# Altium PCB blackfin_pcb.PcbDoc (part 1 of 4)
Units mil, origin at the board's own origin, x right, y up, seen from the top; angles counter-clockwise.
Board outline 4330.71 x 5905.51 mil, 4 copper layers (Top Layer, GROUND, POWER, Bottom Layer), stack 59.76 mil thick; 381 components, 314 nets, 1218 pads, 647 vias.
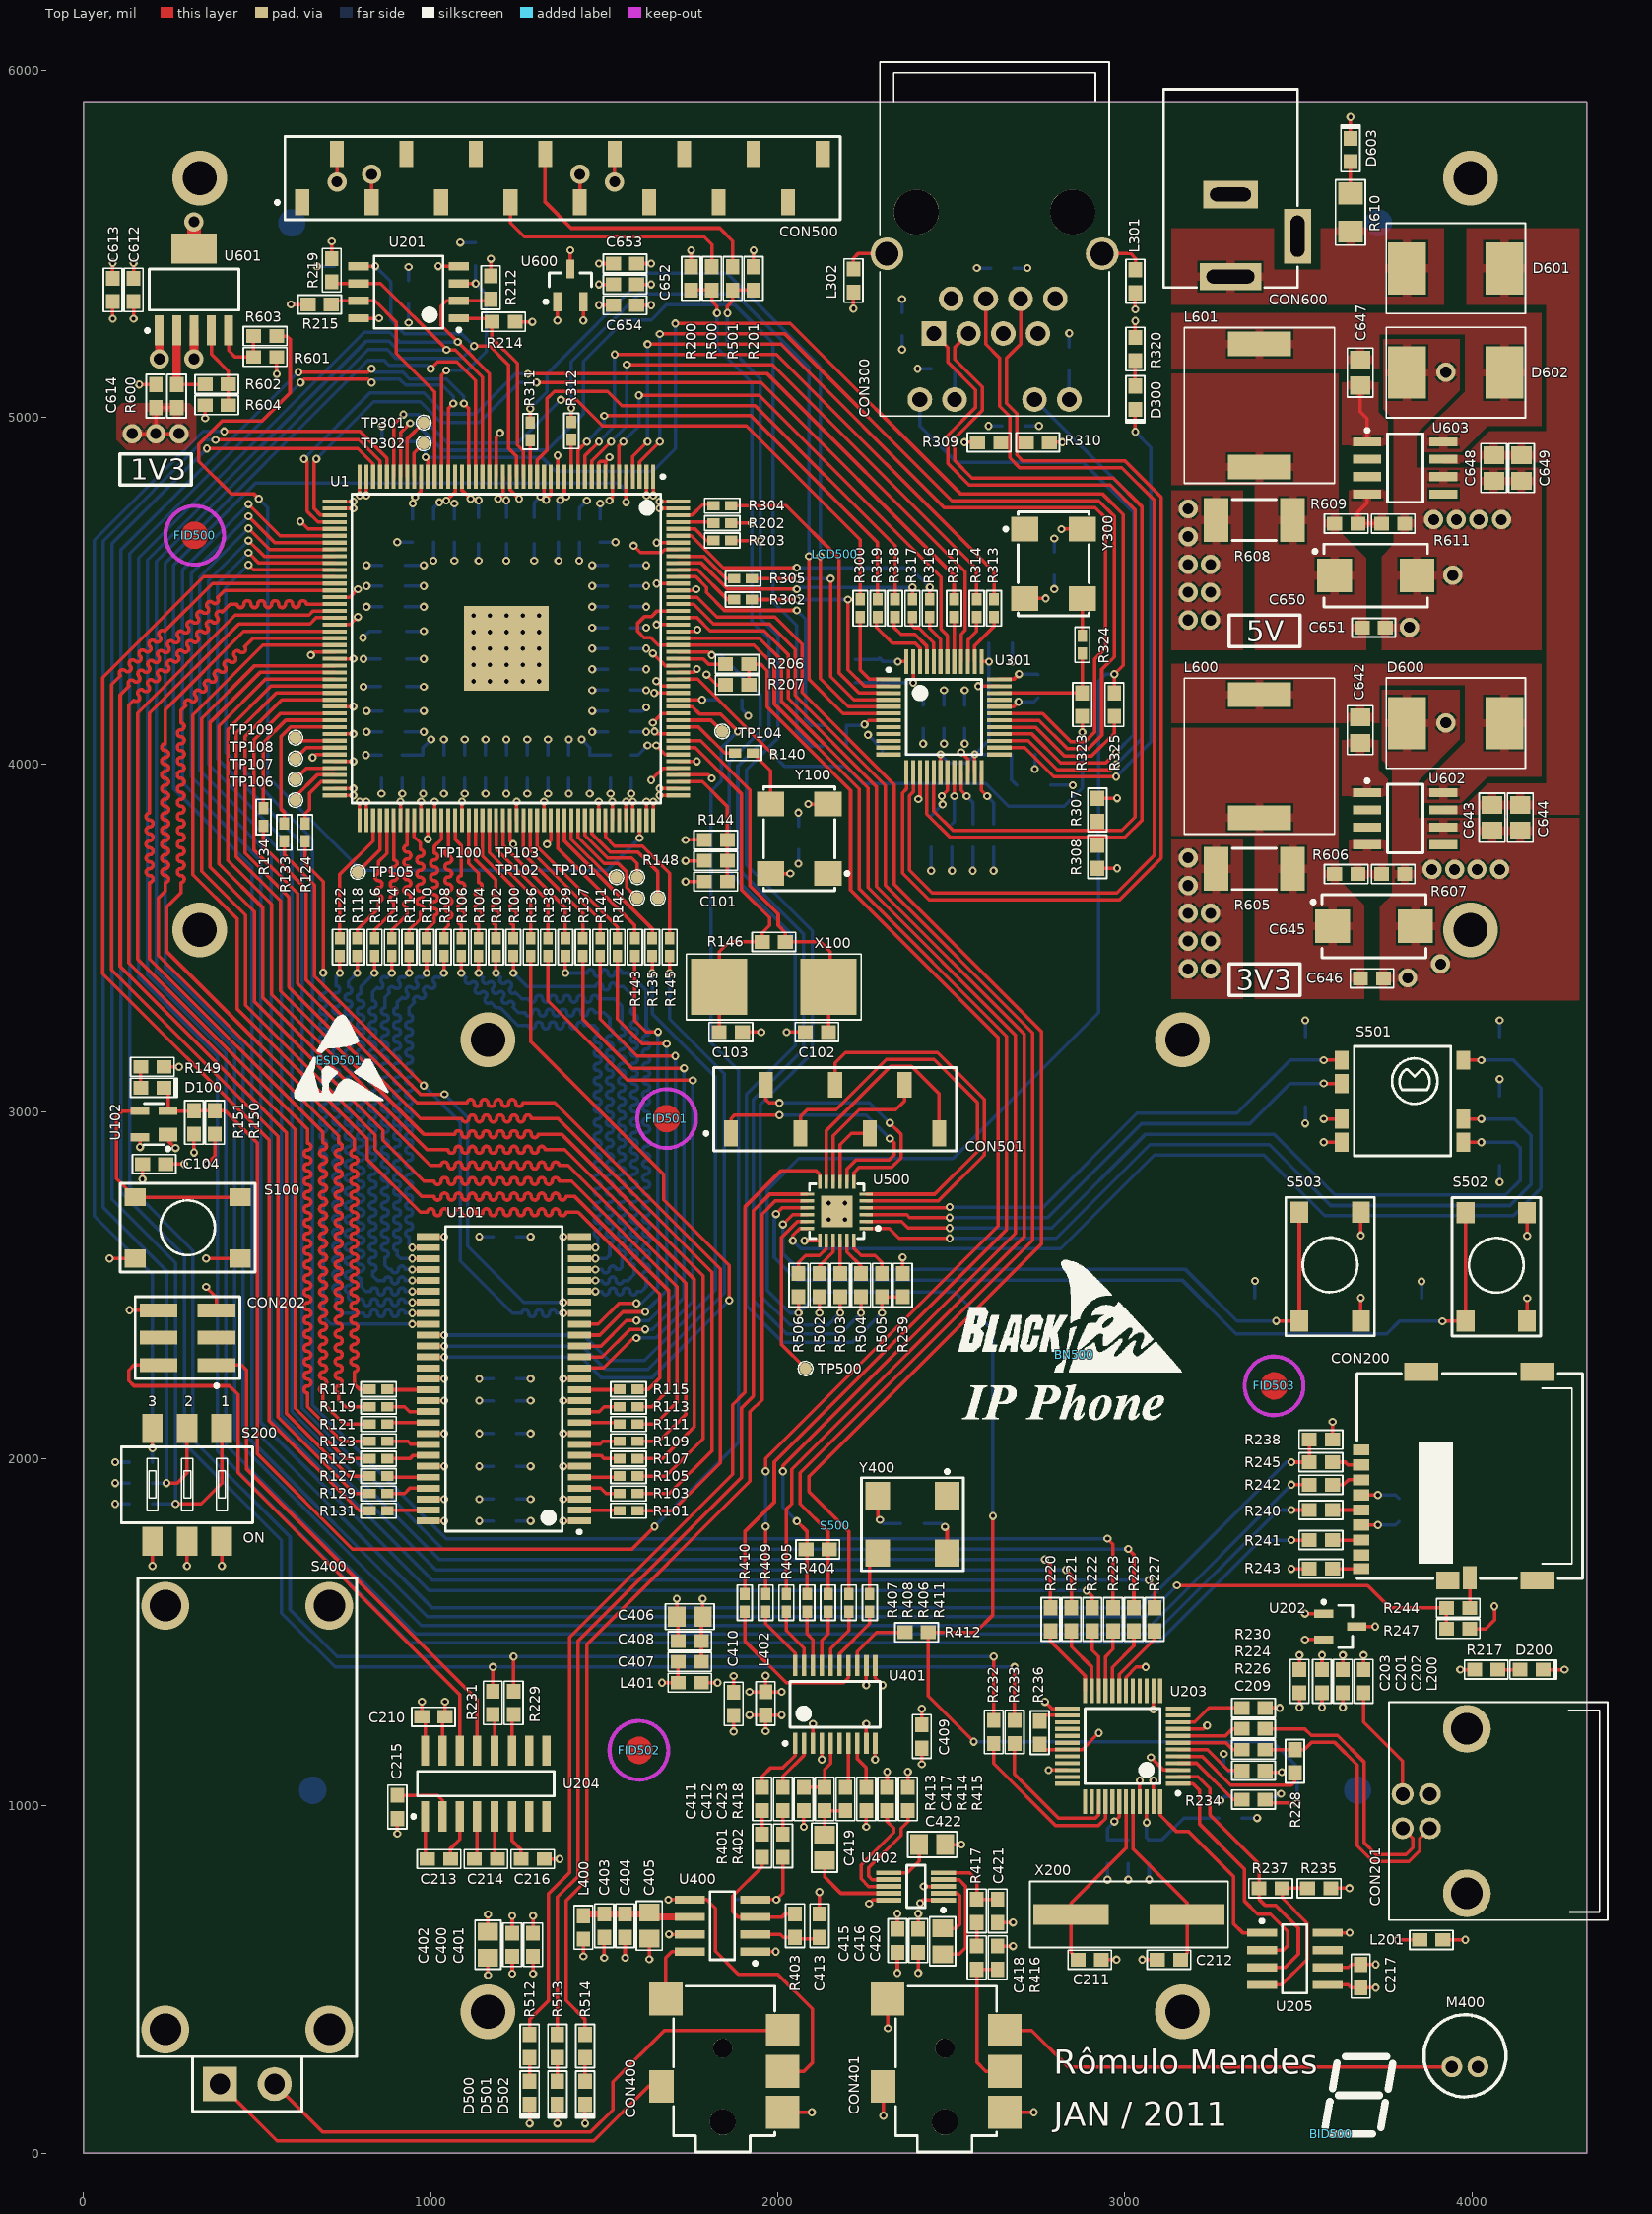
[diagram p0: Top Layer view]
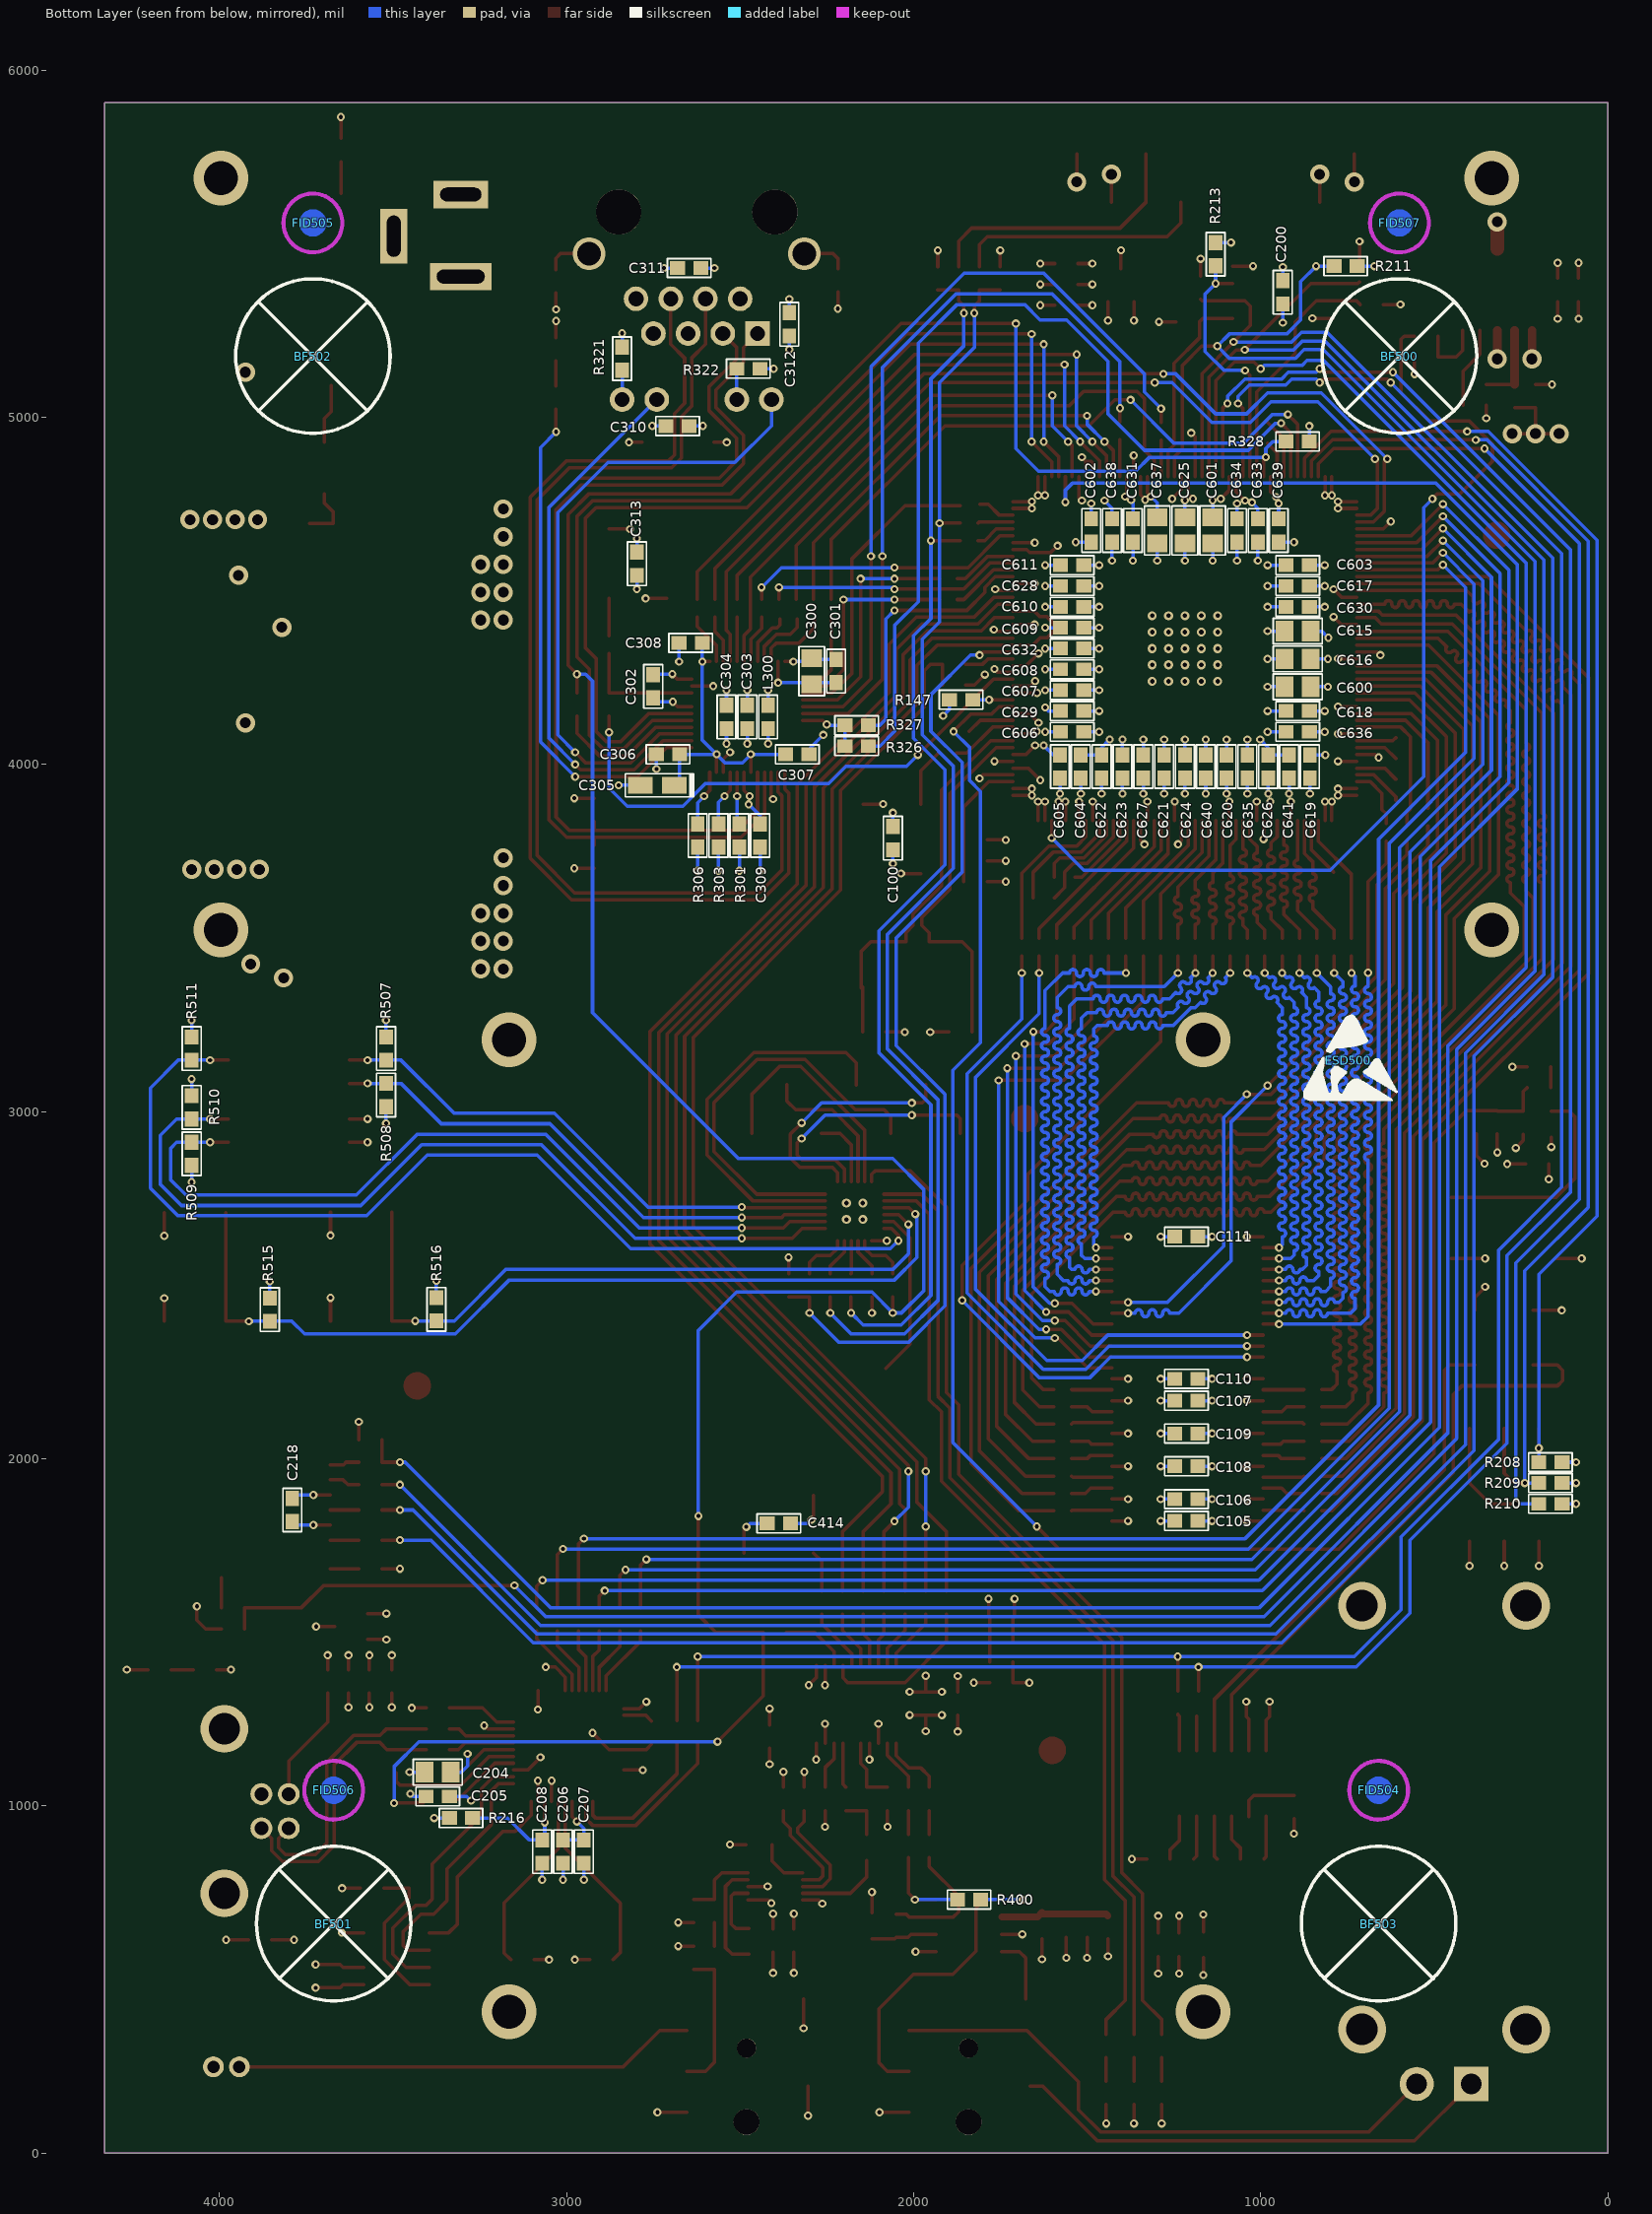
[diagram p1: Bottom Layer view, seen from below]
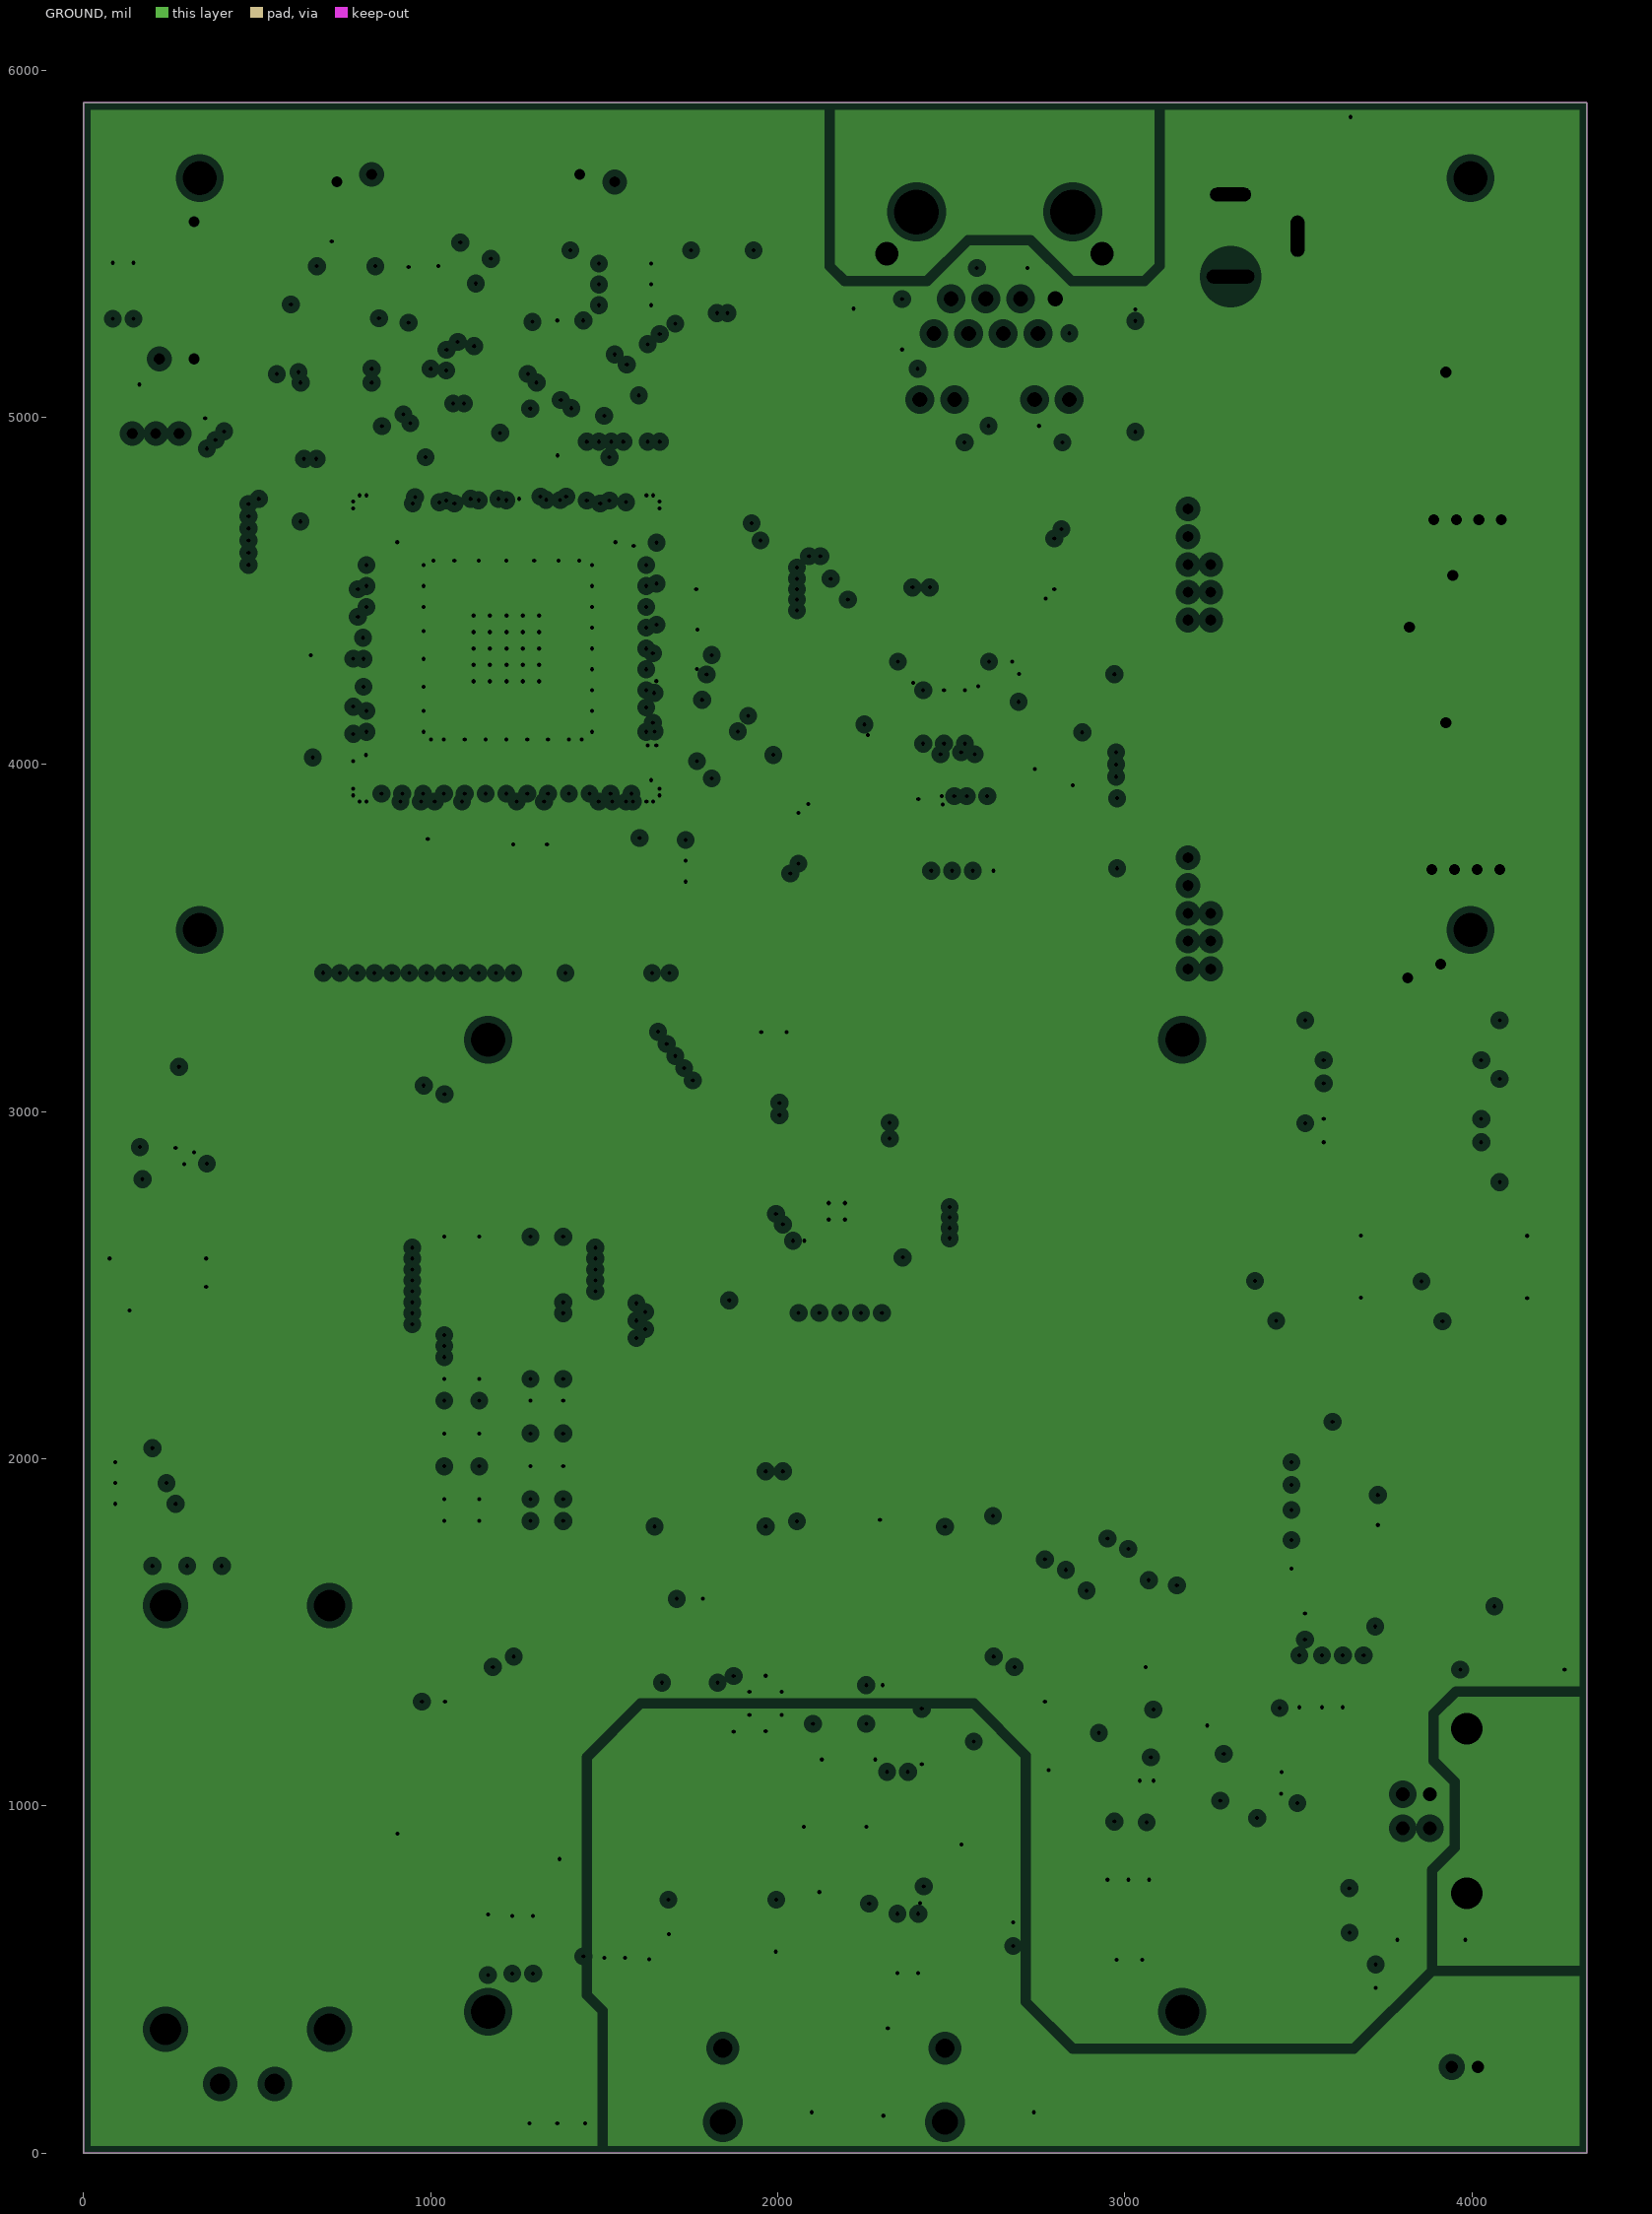
[diagram p2: GROUND, clearances drawn from the general rule]
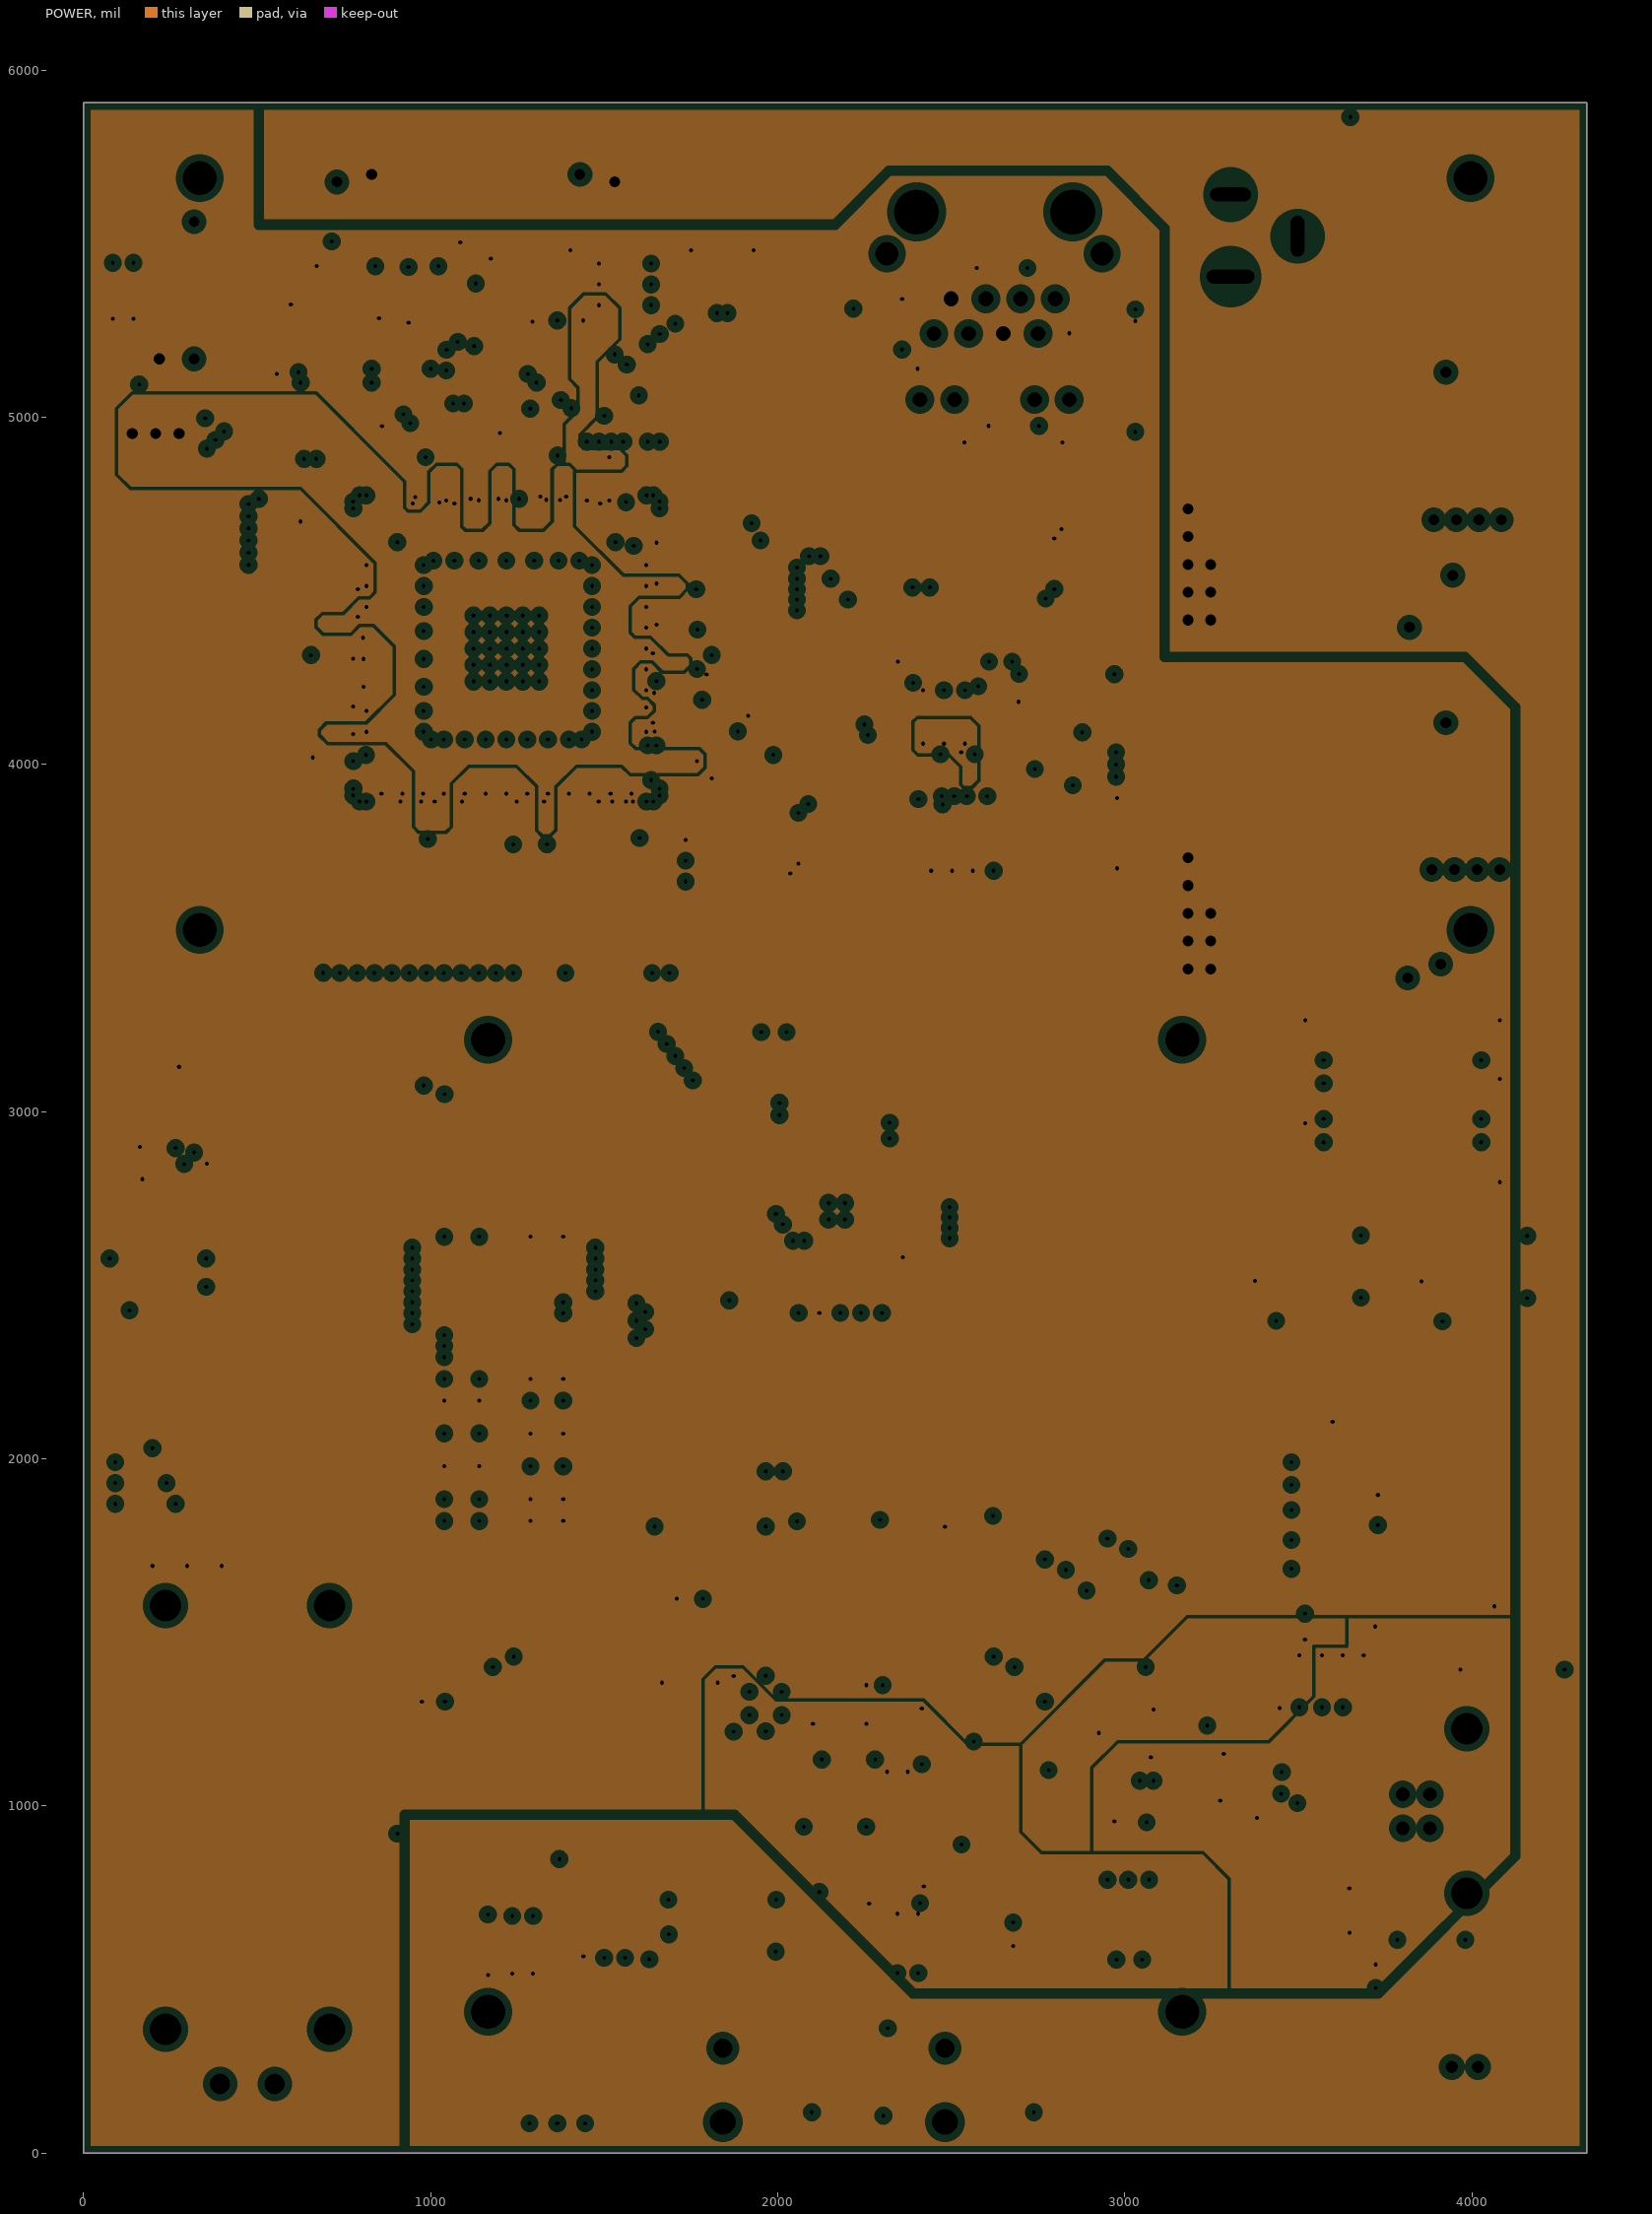
[diagram p3: POWER, clearances drawn from the general rule]

## Layer stack, top to bottom
Top Layer: signal copper 1.58
Dielectric: prepreg 8.5, FR-4, Dk 4.8
GROUND: plane copper 1.3, net (Multiple Nets)
Dielectric: core 37, FR-4, Dk 4.8
POWER: plane copper 1.3, net (Multiple Nets)
Dielectric: prepreg 8.5, FR-4, Dk 4.8
Bottom Layer: signal copper 1.58

## Board outline
0,0 4330.71,0 4330.71,5905.51 0,5905.51

## Design rules (kind name [scope] priority, off if disabled: settings)
Clearance Clearance_5mils [(InComponent('U402'))] p1: gap=5
Clearance Clearance_6mils [All] p2: gap=6
ComponentClearance ComponentClearance_Silks [(HasFootprint('C_0402') OR HasFootprint('C_0603')OR HasFootprint('C_0805') OR HasFootprint('R_0402') OR HasFootprint('R_0603') OR HasFootprint('R_0805') OR HasFootprint('R_1206') OR HasFootprint('R_2512') OR  HasFootprint('L_0402') OR HasFootprint('L_0603')OR HasFootprint('L_0805')OR HasFootprint('LED_0603'))] p1: gap=0 collisioncheckmode=3 verticalgap=10 showdistances=FALSE
ComponentClearance [All] p2: gap=10 collisioncheckmode=3 verticalgap=10 showdistances=FALSE
DiffPairsRouting [All] p1: maxlimit=10 minlimit=10 mostfreqgap=10 maxuncoupledlength=500
FabricationTestPointUsage TestPointUsage [All] p1: valid=0 allowmultiple=FALSE
FabricationTestpoint Testpoint [All] p1: side=3 testpointundercomponent=TRUE minsize=7.87 maxsize=393.7 preferedsize=60 minholesize=0 maxholesize=40 preferedholesize=32 testpointgrid=0 allowsidetop=TRUE allowsidebottom=TRUE usegrid=FALSE gridtolerance=0.01
Height [All] p1: minheight=0 maxheight=2000 prefheight=500
HoleSize [All] p1: absolutevalues=TRUE maxlimit=137.8 minlimit=1 maxpercent=80.000 minpercent=20.000
MatchedLengths MatchedLengths_SDRAM_address [InNetClass('A[1..19]') or InNet('SA10')] p1 off: tolerance=20 checknetsindiffpair=TRUE checkdiffpairvsdiffpair=TRUE checkothers=TRUE
MatchedLengths MatchedLengths_SDRAM_data [InNet('NetR117_1') or InNet('NetR119_1') or InNet('NetR121_1') or InNet('NetR123_1') or InNet('NetR125_1') or InNet('NetR127_1') or InNet('NetR129_1') or InNet('NetR131_1') or InNet('NetR101_1') or InNet('NetR103_1') or InNet('NetR105_1') or InNet('NetR107_1') or InNet('NetR109_1') or InNet('NetR111_1') or InNet('NetR113_1') or InNet('NetR115_1')] p2 off: tolerance=20 checknetsindiffpair=TRUE checkdiffpairvsdiffpair=TRUE checkothers=TRUE
PlaneClearance [All] p1: clearance=20
PlaneConnect [All] p1: planeconnectstyle=Direct reliefexpansion=20 reliefentries=4 reliefconductorwidth=20 reliefairgap=10
PolygonConnect [All] p1: connectstyle=Relief reliefconductorwidth=25 reliefentries=4 polygonreliefangle="90 Angle"
RoutingVias [All] p1: holewidth=28 width=50 viastyle="Through Hole" minholewidth=10 minwidth=20 maxholewidth=100 maxwidth=160
SilkscreenOverComponentPads [All] p1: minsilkscreentomaskgap=10
SolderMaskExpansion [All] p1: expansion=4
Width [InNet('VCC3V3') OR InNet('AVCC5V') OR InNet('GND') OR InNet('NetR600_1') OR IsArc OR InNet('TD_N') OR InNet('TD_P')] p1: maxlimit=100 minlimit=10 preferedwidth=10
Width Width_Impedance_Control [All] p2: maxlimit=11.55 minlimit=7.62 preferedwidth=9.42 impedancedriven=TRUE minimp=54.000000 maximp=66.000000 favimp=60.000000
19 further rules are at their usual default settings.

## Classes and differential pairs
component class blackfin_d_codec: C400 C401 C402 C403 C404 C405 C406 C407 C408 C409 C410 C411 C412 C413 C414 C415 C416 C417 C418 C419 C420 C421 C422 C423 CON400 CON401 L400 L401 L402 L403 L404 L405 M400 R400 R401 R402 R403 R404 R405 R406 R407 R408 R409 R410 R411 R412 R413 R414 R415 R416 R417 R418 S400 U400 U401 U402 Y400
component class blackfin_e_lcd_keypad: B500 BF500 BF501 BF502 BF503 BID500 BN500 CON500 CON501 D500 D501 D502 ESD500 ESD501 FID500 FID501 FID502 FID503 FID504 FID505 FID506 FID507 KEYPAD_HEADER500 LCD500 LCD_HEADER500 LCD_HEADER501 LCD_HEADER502 LCD_RES500 LCD_RES501 R500 R501 R502 R503 R504 R505 R506 R507 R508 R509 R510 R511 R512 R513 R514 R515 R516 S500 S501 S502 S503 S504 S505 SCREW500 SCREW501 SCREW502 SCREW503 SCREW504 SCREW505 SCREW506 SCREW507 SCREW508 SCREW509 SCREW510 SCREW511 SCREW512 SCREW513 SCREW514 SCREW515 SPACER500 SPACER501 SPACER502 SPACER503 SPACER504 SPACER505 SPACER506 SPACER507 TP500 U500
component class blackfin_c_ethernet: C300 C301 C302 C303 C304 C305 C306 C307 C308 C309 C310 C311 C312 C313 CON300 D300 L300 L301 L302 R300 R301 R302 R303 R304 R305 R306 R307 R308 R309 R310 R311 R312 R313 R314 R315 R316 R317 R318 R319 R320 R321 R322 R323 R324 R325 R326 R327 R328 TP300 TP301 TP302 U301 Y300
component class blackfin_b_flash_jtag_serial: C200 C201 C202 C203 C204 C205 C206 C207 C208 C209 C210 C211 C212 C213 C214 C215 C216 C217 C218 CON200 CON201 CON202 D200 D201 L200 L201 R200 R201 R202 R203 R206 R207 R208 R209 R210 R211 R212 R213 R214 R215 R216 R217 R218 R219 R220 R221 R222 R223 R224 R225 R226 R227 R228 R229 R230 R231 R232 R233 R234 R235 R236 R237 R238 R239 R240 R241 R242 R243 R244 R245 R247 S200 U201 U202 U203 U204 U205 U206 X200
component class blackfin_a_sdram: C100 C101 C102 C103 C104 C105 C106 C107 C108 C109 C110 C111 D100 R100 R101 R102 R103 R104 R105 R106 R107 R108 R109 R110 R111 R112 R113 R114 R115 R116 R117 R118 R119 R121 R122 R123 R124 R125 R127 R129 R131 R133 R134 R135 R136 R137 R138 R139 R140 R141 R142 R143 R144 R145 R146 R147 R148 R149 R150 R151 S100 TP100 TP101 TP102 TP103 TP104 TP105 TP106 TP107 TP108 TP109 U1 U101 U102 X100 Y100
component class blackfin_f_power: AC600 AC601 C600 C601 C602 C603 C604 C605 C606 C607 C608 C609 C610 C611 C612 C613 C614 C615 C616 C617 C618 C619 C620 C621 C622 C623 C624 C625 C626 C627 C628 C629 C630 C631 C632 C633 C634 C635 C636 C637 C638 C639 C640 C641 C642 C643 C644 C645 C646 C647 C648 C649 C650 C651 C652 C653 C654 CON600 D600 D601 D602 D603 L600 L601 R600 R601 R602 R603 R604 R605 R606 R607 R608 R609 R610 R611 U600 U601 U602 U603
net class A[1..19]: A1 A2 A3 A4 A5 A6 A7 A8 A9 A10 A12 A13 A18 A19
net class D[0..15]: D0 D1 D2 D3 D4 D5 D6 D7 D8 D9 D10 D11 D12 D13 D14 D15
differential pair RD: +RD_P -RD_N
differential pair TD: +TD_P -TD_N
differential pair USB_CONN: +USB_CONN_P -USB_CONN_N
differential pair USB: +USB_P -USB_N

## Components (designator, comment, footprint, x,y, rotation, side; value= is the part's Value field where it differs from the comment)
BF500 "Board Foot" "Board Foot (Hemisphere)" 600,5175.51 r180 bottom locked
BF501 "Board Foot" "Board Foot (Hemisphere)" 3670.71,660 r180 bottom locked
BF502 "Board Foot" "Board Foot (Hemisphere)" 3730.71,5175.51 r180 bottom locked
BF503 "Board Foot" "Board Foot (Hemisphere)" 660,660 r180 bottom locked
BID500 "Board_ID" BOARD_ID 3595,55 r0 top
BN500 "Board_Name" LOGO 2855,2300 r0 top
C100 "10nF" C_0603 2059.65,3787.62 r270 bottom
C101 "220pF" C_0603 1821.65,3662.54 r0 top
C102 "22pF" C_0603 2112.86,3229.13 r0 top
C103 "22pF" C_0603 1864.83,3229.13 r180 top
C104 "10nF" C_0603 203.11,2848.98 r180 top locked
C105 "10nF" C_0603 1213.98,1820.71 r0 bottom
C106 "10nF" C_0603 1213.98,1883.7 r0 bottom
C107 "10nF" C_0603 1213.98,2167.17 r180 bottom
C108 "10nF" C_0603 1213.98,1978.19 r180 bottom
C109 "10nF" C_0603 1213.98,2072.68 r0 bottom
C110 "10nF" C_0603 1213.98,2230.16 r0 bottom
C111 "10nF" C_0603 1213.98,2639.61 r0 bottom
C200 "10nF" C_0603 936.18,5360.27 r270 bottom
C201 "1uF" C_0603 3568.11,1358.98 r90 top
C202 "100nF" C_0603 3628.11,1358.98 r90 top
C203 "2,2uF" C_0603 3503.11,1358.98 r90 top
C204 "10uF" C_0805 3371.02,1097.11 r180 bottom
C205 "10nF" C_0603 3371.02,1027.11 r180 bottom
C206 "100nF" C_0603 3010.02,868.11 r90 bottom
C207 "100nF" C_0603 2950.02,868.11 r90 bottom
C208 "100nF" C_0603 3070.02,868.11 r90 bottom
C209 "33nF" C_0603 3371.02,1102.11 r0 top
C210 "100nF" C_0603 1007.98,1256.89 r180 top
C211 "22pF" C_0603 2899.02,557.11 r0 top
C212 "22pF" C_0603 3127.02,557.11 r180 top
C213 "100nF" C_0603 1023.98,846.89 r180 top
C214 "100nF" C_0603 1158.98,846.89 r180 top
C215 "100nF" C_0603 903.98,996.89 r90 top
C216 "100nF" C_0603 1293.98,846.89 r180 top
C217 "100nF" C_0603 3679.57,509.51 r90 top
C218 "100nF" C_0603 3790,1852.36 r90 bottom
C300 "10uF" C_0805 2293.66,4268.82 r90 bottom
C301 "100nF" C_0603 2223.11,4268.98 r90 bottom
C302 "100nF" C_0603 2750,4225 r270 bottom
C303 "1uF" C_0603 2478.98,4136.89 r270 bottom
C304 "100nF" C_0603 2538.98,4136.89 r270 bottom
C305 "10uF" C_Case_A 2738.2,3940 r0 bottom
C306 "100nF" C_0603 2707.46,4029.13 r180 bottom
C307 "100nF" C_0603 2335,4029.13 r0 bottom
C308 "100nF" C_0603 2642.13,4350 r180 bottom
C309 "100nF" C_0603 2442,3795 r270 bottom
C310 "100nF" C_0603 2680,4975 r180 bottom
C311 "100nF" C_0603 2646.54,5430 r0 bottom
C312 "100nF" C_0603 2358.11,5267.98 r270 bottom
C313 "10nF" C_0603 2797.02,4578.11 r90 bottom
C400 "100nF" C_0603 1235,600 r270 top
C401 "1uF" C_0603 1295,600 r270 top
C402 "10uF" C_0805 1165,600 r270 top
C403 "100nF" C_0603 1500,655 r90 top
C404 "1uF" C_0603 1560,655 r90 top
C405 "10uF" C_0805 1630,655 r90 top
C406 "10uF" C_0805 1746.54,1545 r180 top
C407 "100nF" C_0603 1746.54,1415 r180 top
C408 "100nF" C_0603 1746.54,1475 r180 top
C409 "1uF" C_0603 2415,1200 r90 top
C410 "100nF" C_0603 1872.81,1294 r90 top
C411 "1uF" C_0603 1955,1020 r90 top
C412 "1uF" C_0603 2015,1020 r90 top
C413 "100nF" C_0603 2120,655 r270 top
C414 "10nF" C_0603 2388.11,1813.84 r0 bottom
C415 "100nF" C_0603 2344.81,611.54 r90 top
C416 "1uF" C_0603 2404.81,611.54 r90 top
C417 "100nF" C_0603 2255,1020 r90 top
C418 "100nF" C_0603 2573.52,562.62 r90 top
C419 "10uF" C_0805 2135,880 r90 top
C420 "10uF" C_0805 2475,610 r90 top
C421 "1nF" C_0603 2633.52,697.62 r90 top
C422 "10uF" C_0805 2445.17,888.52 r0 top
C423 "47nF" C_0603 2075,1020 r90 top
C600 "10uF" C_0805 893.11,4223.98 r180 bottom locked
C601 "10uF" C_0805 1138.11,4673.98 r90 bottom locked
C602 "100nF" C_0603 1488.11,4673.98 r90 bottom locked
C603 "100nF" C_0603 893.11,4573.98 r180 bottom locked
C604 "100nF" C_0603 1518.11,3993.98 r270 bottom locked
C605 "100nF" C_0603 1578.11,3993.98 r270 bottom locked
C606 "10nF" C_0603 1543.11,4093.98 r0 bottom locked
C607 "10nF" C_0603 1543.11,4213.98 r0 bottom locked
C608 "10nF" C_0603 1543.11,4273.98 r0 bottom locked
C609 "10nF" C_0603 1543.11,4393.98 r0 bottom locked
C610 "10nF" C_0603 1543.11,4453.98 r0 bottom locked
C611 "10nF" C_0603 1543.11,4573.98 r0 bottom locked
C612 "1uF" C_0603 143.98,5366.89 r270 top
C613 "100nF" C_0603 83.98,5366.89 r270 top
C614 "1uF" C_0603 208.11,5061.18 r270 top
C615 "10uF" C_0805 893.11,4383.98 r180 bottom locked
C616 "10uF" C_0805 893.11,4303.98 r180 bottom locked
C617 "100nF" C_0603 893.11,4513.98 r180 bottom locked
C618 "100nF" C_0603 893.11,4153.98 r180 bottom locked
C619 "10nF" C_0603 858.11,3993.98 r270 bottom locked
C620 "10nF" C_0603 1098.11,3993.98 r270 bottom locked
C621 "10nF" C_0603 1278.11,3993.98 r270 bottom locked
C622 "10nF" C_0603 1458.11,3993.98 r270 bottom locked
C623 "10nF" C_0603 1398.11,3993.98 r270 bottom locked
C624 "10nF" C_0603 1218.11,3993.98 r270 bottom locked
C625 "10uF" C_0805 1218.11,4673.98 r90 bottom locked
C626 "100nF" C_0603 978.11,3993.98 r270 bottom locked
C627 "100nF" C_0603 1338.11,3993.98 r270 bottom locked
C628 "100nF" C_0603 1543.11,4513.98 r0 bottom locked
C629 "100nF" C_0603 1543.11,4153.98 r0 bottom locked
C630 "10nF" C_0603 893.11,4453.98 r180 bottom locked
C631 "10nF" C_0603 1368.11,4673.98 r90 bottom locked
C632 "10nF" C_0603 1543.11,4333.98 r0 bottom locked
C633 "10nF" C_0603 1008.11,4673.98 r90 bottom locked
C634 "10nF" C_0603 1068.11,4673.98 r90 bottom locked
C635 "10nF" C_0603 1038.11,3993.98 r270 bottom locked
C636 "10nF" C_0603 893.11,4093.98 r180 bottom locked
C637 "10uF" C_0805 1298.11,4673.98 r90 bottom locked
C638 "100nF" C_0603 1428.11,4673.98 r90 bottom locked
C639 "100nF" C_0603 948.11,4673.98 r90 bottom locked
C640 "100nF" C_0603 1158.11,3993.98 r270 bottom locked
C641 "100nF" C_0603 918.11,3993.98 r270 bottom locked
C642 "10nF" C_0805 3678.11,4098.98 r90 top
C643 "10uF" C_0805 4058.11,3846.38 r90 top
C644 "4,7uF" C_0805 4139.37,3846.38 r90 top
C645 "470uF" C_Case_Y 3718.11,3533.98 r0 top
C646 "100nF" C_0603 3712.24,3383.98 r180 top
C647 "10nF" C_0805 3678.11,5128.98 r90 top
C648 "10uF" C_0805 4063.11,4853.98 r90 top
C649 "4,7uF" C_0805 4143.11,4853.98 r90 top
C650 "470uF" C_Case_Y 3723.11,4543.98 r0 top
C651 "100nF" C_0603 3717.24,4393.98 r180 top
C652 "1uF" C_0603 1560,5382.81 r180 top
C653 "100nF" C_0603 1560,5442.81 r180 top
C654 "2,2uF" C_0603 1560,5322.81 r180 top
CON200 "MicroSD" MICRO_SD 3935,1950 r270 top locked
CON201 "USB Connector" "USB Connector" 3800.39,1033.98 r90 top locked
CON202 "RS-232_CONN" Header_2x3 383,2270 r90 top
CON300 "RJ-45" RJ-45 2449.65,5241.43 r180 top locked
CON400 "Phone_Jack" Phone_Jack 2013.78,117.2 r90 top locked
CON401 "Phone_Jack" Phone_Jack 2653.54,117.2 r90 top locked
CON500 "LCD_Connector" SOCKET_1x16 629.92,5619 r0 top locked
CON501 "Keypad_Connector" SOCKET_1x7 2165.35,3007.09 r0 top locked
CON600 "Power_Jack" Power_Jack 3304.65,5405.51 r270 top
D100 "LED" LED_0603 198.11,3068.98 r0 top locked
D200 "LED" LED_0603 4171.89,1392.44 r0 top
D300 "LED" LED_0603 3030.11,5056.46 r270 top
D500 "LED" LED_0603 1285,173.46 r270 top
D501 "LED" LED_0603 1365,173.46 r270 top
D502 "LED" LED_0603 1445,173.46 r270 top
D600 "MBRS330T3G" Case_430 3813.11,4118.98 r0 top
D601 "MBRS330T3G" Case_430 3813.11,5428.98 r0 top
D602 "MBRS330T3G" Case_430 3813.11,5128.98 r0 top
D603 "LED" LED_0603 3650,5770 r90 top
ESD500 "ESD" ESD 747,3147 r180 bottom
ESD501 "ESD" ESD 737,3148 r0 top
FID500 "Fiducial" Fiducial 320,4660 r90 top
FID501 "Fiducial" Fiducial 1680,2980 r90 top
FID502 "Fiducial" Fiducial 1600,1160 r90 top
FID503 "Fiducial" Fiducial 3430,2210 r90 top
FID504 "Fiducial" Fiducial 660,1045 r270 bottom
FID505 "Fiducial" Fiducial 3730.71,5560 r270 bottom
FID506 "Fiducial" Fiducial 3670.71,1045 r270 bottom
FID507 "Fiducial" Fiducial 600,5560 r270 bottom
L200 "FBEAD" L_0603 3688.11,1358.98 r90 top
L201 "FBEAD" L_0603 3883.11,613.98 r180 top
L300 "FBEAD" L_0603 2418.98,4136.89 r270 bottom
L301 "FBEAD" L_0603 3030.11,5391.98 r90 top
L302 "FBEAD" L_0603 2218.11,5393.98 r90 top
L400 "FBEAD" L_0603 1440,650 r90 top
L401 "FBEAD" L_0603 1746.54,1355 r0 top
L402 "FBEAD" L_0603 1965,1295 r270 top
L600 "22uH" Inductor_22uH 3388.11,4023.98 r0 top
L601 "22uH" Inductor_22uH 3388.11,5033.98 r0 top
LCD500 "LCD" LCD 2165.35,4606.3 r180 top locked
M400 "POM-2738P-C33-R" Microphone 3980,280 r180 top
R100 "22R" R_0402 1238.11,3473.98 r90 top
R101 "22R" R_0402 1570,1850 r180 top
R102 "22R" R_0402 1188.11,3473.98 r90 top
R103 "22R" R_0402 1570,1900 r180 top
R104 "22R" R_0402 1138.11,3473.98 r90 top
R105 "22R" R_0402 1570,1950 r180 top
R106 "22R" R_0402 1088.11,3473.98 r90 top
R107 "22R" R_0402 1570,2000 r180 top
R108 "22R" R_0402 1038.11,3473.98 r90 top
R109 "22R" R_0402 1570,2050 r180 top
R110 "22R" R_0402 988.11,3473.98 r90 top
R111 "22R" R_0402 1570,2100 r180 top
R112 "22R" R_0402 938.11,3473.98 r90 top
R113 "22R" R_0402 1570,2150 r180 top
R114 "22R" R_0402 888.11,3473.98 r90 top
R115 "22R" R_0402 1570,2200 r180 top
R116 "22R" R_0402 838.11,3473.98 r90 top
R117 "22R" R_0402 850,2200 r0 top
R118 "22R" R_0402 788.11,3473.98 r90 top
R119 "22R" R_0402 850,2150 r0 top
R121 "22R" R_0402 850,2100 r0 top
R122 "22R" R_0402 738.11,3473.98 r90 top
R123 "22R" R_0402 850,2050 r0 top
R124 "22R" R_0402 638.11,3803.98 r90 top
R125 "22R" R_0402 850,2000 r0 top
R127 "22R" R_0402 850,1950 r0 top
R129 "22R" R_0402 850,1900 r0 top
R131 "22R" R_0402 850,1850 r0 top
R133 "22R" R_0402 578.11,3803.98 r90 top
R134 "22R" R_0402 518.11,3848.98 r90 top
R135 "22R" R_0402 1638.11,3473.98 r90 top
R136 "22R" R_0402 1288.11,3473.98 r270 top
R137 "22R" R_0402 1438.11,3473.98 r90 top
R138 "22R" R_0402 1338.11,3473.98 r270 top
R139 "22R" R_0402 1388.11,3473.98 r90 top
R140 "33R" R_0402 1902.52,4032.88 r180 top
R141 "22R" R_0402 1488.11,3473.98 r90 top
R142 "22R" R_0402 1538.11,3473.98 r90 top
R143 "22R" R_0402 1588.11,3473.98 r90 top
R144 "100K" R_0603 1821.65,3782.54 r180 top
R145 "22R" R_0402 1688.11,3473.98 r270 top
R146 "10M" R_0603 1988.84,3489.13 r180 top
R147 "10K" R_0603 1863.11,4186.34 r0 bottom
R148 "33K" R_0603 1821.65,3722.54 r0 top
R149 "100R" R_0603 198.11,3128.98 r0 top locked
R150 "10K" R_0603 378.11,2968.98 r90 top locked
R151 "100K" R_0603 318.11,2968.98 r90 top locked
R200 "1K2" R_0603 1750.18,5400 r90 top
R201 "1K2" R_0603 1930.18,5400 r90 top
R202 "33R" R_0402 1840,4695 r180 top
R203 "33R" R_0402 1840,4645 r180 top
R206 "0R" R_0603 1883.11,4288.98 r180 top
R207 "4K7" R_0603 1883.11,4228.98 r0 top
R208 "4K7" R_0603 165,1990 r0 bottom
R209 "4K7" R_0603 165,1930 r0 bottom
R210 "4K7" R_0603 165,1870 r0 bottom
R211 "10K" R_0603 755,5435.27 r180 bottom
R212 "10K" R_0603 1173.11,5373.73 r90 top
R213 "10K" R_0603 1129.73,5470 r90 bottom
R214 "10K" R_0603 1210,5275 r0 top
R215 "10K" R_0603 680,5325 r180 top
R216 "470R" R_0603 3304.09,965 r180 bottom
R217 "150R" R_0603 4041.54,1392.44 r180 top
R219 "10K" R_0603 715,5423.73 r270 top
R220 "0R" R_0603 2786.02,1537.11 r90 top
R221 "0R" R_0603 2846.02,1537.11 r90 top
R222 "0R" R_0603 2906.02,1537.11 r90 top
R223 "0R" R_0603 2966.02,1537.11 r90 top
R224 "27R" R_0603 3371.02,1222.11 r180 top
R225 "0R" R_0603 3026.02,1537.11 r90 top
R226 "27R" R_0603 3371.02,1162.11 r180 top
R227 "0R" R_0603 3086.02,1537.11 r90 top
R228 "1K5" R_0603 3490,1128.65 r270 top
R229 "0R" R_0603 1238.98,1296.89 r270 top
R230 "10K" R_0603 3371.02,1282.11 r180 top
R231 "0R" R_0603 1178.98,1296.89 r270 top
R232 "0R" R_0603 2622.18,1212.89 r90 top
R233 "0R" R_0603 2682.18,1212.89 r90 top
R234 "0R" R_0603 3371.02,1018.11 r180 top
R235 "10K" R_0603 3560,762.82 r0 top
R236 "10K" R_0603 2755,1211 r90 top
R237 "2K2" R_0603 3420,762.82 r0 top
R238 "10K" R_0603 3565,2055 r0 top
R239 "4K7" R_0603 2360,2500 r270 top
R240 "0R" R_0603 3565,1852.36 r0 top
R241 "0R" R_0603 3565,1765.75 r0 top
R242 "0R" R_0603 3565,1925 r0 top
R243 "0R" R_0603 3565,1683.07 r0 top
R244 "0R" R_0603 3960.59,1570 r180 top
R245 "0R" R_0603 3565,1990 r180 top
R247 "10K" R_0603 3960.59,1510 r0 top
R300 "50R" R_0402 2238,4450 r270 top
R301 "2K2" R_0603 2502,3795 r90 bottom
R302 "50R" R_0402 1900,4475 r0 top
R303 "2K2" R_0603 2562,3795 r90 bottom
R304 "50R" R_0402 1840,4745 r0 top
R305 "50R" R_0402 1900,4535 r0 top
R306 "4K87" R_0603 2622,3795 r90 bottom
R307 "49R9" R_0603 2920.73,3869.16 r90 top
R308 "49R9" R_0603 2920.73,3734.16 r270 top
R309 "49R9" R_0603 2609.11,4927.98 r180 top
R310 "49R9" R_0603 2749.11,4927.98 r0 top
R311 "50R" R_0402 1287.01,4958.98 r90 top
R312 "50R" R_0402 1405.12,4960.47 r90 top
R313 "50R" R_0402 2623,4450 r270 top
R314 "50R" R_0402 2573,4450 r270 top
R315 "50R" R_0402 2508,4450 r270 top
R316 "50R" R_0402 2438,4450 r270 top
R317 "50R" R_0402 2388,4450 r270 top
R318 "50R" R_0402 2338,4450 r270 top
R319 "50R" R_0402 2288,4450 r270 top
R320 "130R" R_0603 3030.11,5196.46 r90 top
R321 "270R" R_0603 2839.8,5168.98 r90 bottom
R322 "270R" R_0603 2476.02,5140 r180 bottom
R323 "0R" R_0603 2877.38,4172.32 r90 top
R324 "33R" R_0402 2877.38,4345 r270 top
R325 "0R" R_0603 2970,4172.32 r90 top
R326 "0R" R_0603 2163.98,4052.95 r180 bottom
R327 "0R" R_0603 2163.98,4112.89 r180 bottom
R328 "10K" R_0603 893.31,4930 r0 bottom
R400 "20K" R_0603 1840,730 r180 bottom
R401 "20K" R_0603 1955,885 r90 top
R402 "20K" R_0603 2015,885 r90 top
R403 "20K" R_0603 2050,655 r90 top
R404 "0R" R_0603 2115.11,1738.84 r180 top
R405 "22R" R_0402 2025,1585 r270 top
R406 "22R" R_0402 2205,1585 r270 top
R407 "22R" R_0402 2085,1585 r270 top
R408 "22R" R_0402 2145,1585 r270 top
R409 "22R" R_0402 1965,1585 r270 top
R410 "22R" R_0402 1905,1585 r270 top
R411 "33R" R_0402 2265,1585 r270 top
R412 "0R" R_0603 2400,1500 r180 top
R413 "10K" R_0603 2195,1020 r90 top
R414 "15K" R_0603 2315,1020 r90 top
R415 "1K" R_0603 2375,1020 r90 top
R416 "2K2" R_0603 2633.52,562.62 r270 top
R417 "10K" R_0603 2573.52,697.62 r90 top
R418 "100K" R_0603 2135,1020 r90 top
R500 "0R" R_0603 1810.18,5400 r270 top
R501 "0R" R_0603 1870.18,5400 r270 top
R502 "0R" R_0603 2120,2500 r270 top
R503 "0R" R_0603 2180,2500 r270 top
R504 "0R" R_0603 2240,2500 r270 top
R505 "0R" R_0603 2300,2500 r270 top
R506 "0R" R_0603 2060,2500 r270 top
R507 "10K" R_0603 3520,3181.57 r270 bottom
R508 "10K" R_0603 3520,3047.72 r90 bottom
R509 "10K" R_0603 4080,2878.43 r90 bottom
R510 "10K" R_0603 4080,3012.28 r270 bottom
R511 "10K" R_0603 4080,3181.57 r270 bottom
R512 "100R" R_0603 1285,308.46 r90 top
R513 "100R" R_0603 1365,308.46 r90 top
R514 "100R" R_0603 1445,308.46 r90 top
R515 "10K" R_0603 3855,2429.47 r270 bottom
R516 "10K" R_0603 3375,2430.47 r270 bottom
R600 "0R" R_0603 268.11,5061.18 r270 top
R601 "0R" R_0603 523.11,5173.98 r0 top
R602 "20K" R_0603 383.46,5095 r180 top
R603 "0R" R_0603 523.11,5233.98 r180 top
R604 "255K" R_0603 383.46,5035 r0 top
R605 "0R" R_2512 3373.11,3698.98 r180 top
R606 "10K" R_0603 3638.11,3683.98 r180 top
R607 "5K76" R_0603 3773.11,3683.98 r180 top
R608 "0R" R_2512 3373.11,4703.98 r180 top
R609 "10K" R_0603 3638.11,4693.98 r180 top
R610 "400R" R_1206 3650,5590 r270 top
R611 "3K24" R_0603 3773.11,4693.98 r180 top
S100 "Push Button" "Push Button"#1 148.11,2753.98 r0 top locked
S200 "DIP Switch" "DIP Switch" 398.11,2086.98 r180 top
S400 "GC0351P" Speaker 392.99,198.98 r90 top locked
S500 "Keypad" Keypad 2165.35,1807.09 r0 top locked
S501 "TPA511GLFS" TPA511GLFS 3800,3030 r0 top locked
S502 "Push Button" "Push Button"#2 4159,2709 r270 top
S503 "Push Button" "Push Button"#2 3680,2710 r270 top
TP100 "Test Point" "Test Point" 1535,3675 r180 top
TP101 "Test Point" "Test Point" 1655,3615 r180 top
TP102 "Test Point" "Test Point" 1595,3615 r180 top
TP103 "Test Point" "Test Point" 1595,3675 r180 top
TP104 "Test Point" "Test Point" 1840,4095 r90 top
TP105 "Test Point" "Test Point" 790,3690 r0 top
TP106 "Test Point" "Test Point" 610.35,3897.09 r0 top
TP107 "Test Point" "Test Point" 610.35,3957.09 r0 top
TP108 "Test Point" "Test Point" 610.35,4017.09 r0 top
TP109 "Test Point" "Test Point" 610.35,4077.09 r0 top
TP301 "Test Point" "Test Point" 980,4985 r90 top
TP302 "Test Point" "Test Point" 980,4925 r90 top
TP500 "Test Point" "Test Point" 2080,2260 r90 top
U1 "ADSP-BF518" LQFP-176 1218.11,4333.98 r270 top locked
U101 "MT48LC16M16A2P" TSOP-54 1210.74,2230.16 r180 top locked
U102 "CAT811S" SOT-143 243.11,2933.98 r180 top locked
U201 "S25FL032P" SO-8 1081.18,5285.27 r180 top locked
U202 "AME8800AEETZ" SOT-23 3573.11,1553.98 r0 top
U203 "FT2232D" LQFP-48 2993.78,1172.11 r180 top locked
U204 "SN65C3232EDR" SOIC-16 1158.98,1064.13 r90 top
U205 "AT93C56A" "SOIC-8 (AT93C56A)" 3489.57,559.51 r0 top
U301 "DP83848C" LQFP-48 2478.98,4136.89 r0 top locked
U400 "SSM2211" "SOIC-8 (SSM2211)" 1935,580 r180 top
U401 "AD73311L" TSSOP-20 2050.2,1180 r90 top
U402 "SSM2167" MSOP-10 2477.17,728.52 r180 top
U500 "ADP5588" QFN-24 2254.65,2663.62 r180 top
U600 "AME8800DEETZ" SOT-23 1365,5332.81 r90 top locked
U601 "TPS73701DCQ" SOT-223 218.11,5249.92 r90 top locked
U602 "TPS5420MDREP" "SOIC-8 (TPS5420MDREP)" 3698.11,3918.98 r0 top
U603 "TPS5420MDREP" "SOIC-8 (TPS5420MDREP)" 3698.11,4928.98 r0 top
X100 "32.768KHz" XTAL_32.768kHz 1988.84,3359.13 r180 top
X200 "6MHz" XTAL_6MHz 3012.02,687.11 r180 top
Y100 "25MHz" OSC_25MHz 2144.65,3685.88 r270 top
Y300 "25MHz" OSC_25MHz 2712.02,4678.11 r90 top
Y400 "16.384MHz" OSC_16.384MHz 2488.11,1893.84 r0 top

## Footprints (in the part's own frame and the unit in brackets; to place one, negate y for a bottom-side part, rotate by r counter-clockwise, add the part's x,y. Pads: shape width x height; smd on the part's side, far side on the other; paste and mask are expansions set on the pad)
"Board Foot (Hemisphere)" [mil] "Board Foot"
  silkscreen extent -222,-221 222,223
BOARD_ID [mil] "BOARD_ID"
  silkscreen extent -17,0 177,223
C_0603 [mm]
  rect 1.1x1 smd: 1(-0.85,0) 2(0.85,0)
  silkscreen extent -1.59,-0.69 1.59,0.69
C_0805 [mm]
  rect 1.3x1.5 smd: 1(-0.95,0) 2(0.95,0)
  silkscreen extent -1.79,-0.94 1.79,0.94
C_Case_A [mm]
  rect 1.8x1.25 smd: 1(-1.25,0) 2(1.25,0)
  silkscreen extent -2.67,-0.9 2.33,0.9
C_Case_Y [mm] "T520Y477M006ATE015"
  rect 2.55x2.45 smd: 1(-3.025,0) 2(3.025,0)
  silkscreen extent -4.57,-2.3 3.8,2.3
Case_430 [mil] "MBRS330T3G"
  rect 110x150 smd: 1(0,0) 2(281,0)
  silkscreen extent -60,-130 341,130
"DIP Switch" [mm]
  rect 1.5x2.15 smd mask+0.076: 1(0,0) 2(2.54,0) 3(5.08,0) 4(5.08,8.25) 5(2.54,8.25) 6(0,8.25)
  silkscreen extent -2.26,1.35 7.34,6.9
ESD [mil]
  silkscreen extent -130,-116 141,131
Fiducial [mil] "Fiducial"
  Top Layer circle w39.37: c0,0 r19.68
  Top Layer keep-out circle w11.81: c0,0 r84.65
Header_2x3 [mm] "RS-232 Connector"
  rect 1x2.75 smd: 1(0,0) 2(0,4.25) 3(2,0) 4(2,4.25) 5(4,0) 6(4,4.25)
  silkscreen extent -1.65,-1.7 5,5.95
Inductor_22uH [mm] "744066220"
  rect 4.6x1.8 smd: 1(0,4.5) 2(0,-4.5)
  silkscreen extent -5.5,-5.7 5.5,5.7
Keypad [mil] "Keypad"
  body extent -1104,-1504 1104,1504, height 1378
L_0603 [mm]
  rect 1.1x1 smd: 1(-0.85,0) 2(0.85,0)
  silkscreen extent -1.59,-0.69 1.59,0.69
LCD [mil] "LCD"
  body extent -1933,-1185 1933,1185, height 1378
LED_0603 [mm]
  rect 1.1x1 smd: 1(-0.85,0) 2(0.85,0)
  silkscreen extent -1.59,-0.71 1.89,0.71
LOGO [mil]
  silkscreen extent -334,-187 310,273
LQFP-48 [mm] "DP83848C, FT2232D"
  rect 1.8x0.3 smd: 1(-4.05,2.75) 2(-4.05,2.25) 3(-4.05,1.75) 4(-4.05,1.25) 5(-4.05,0.75) 6(-4.05,0.25) 7(-4.05,-0.25) 8(-4.05,-0.75) 9(-4.05,-1.25) 10(-4.05,-1.75) 11(-4.05,-2.25) 12(-4.05,-2.75) 25(4.05,-2.75) 26(4.05,-2.25) 27(4.05,-1.75) 28(4.05,-1.25) 29(4.05,-0.75) 30(4.05,-0.25) 31(4.05,0.25) 32(4.05,0.75) 33(4.05,1.25) 34(4.05,1.75) 35(4.05,2.25) 36(4.05,2.75)
  rect 0.3x1.8 smd: 13(-2.75,-4.05) 14(-2.25,-4.05) 15(-1.75,-4.05) 16(-1.25,-4.05) 17(-0.75,-4.05) 18(-0.25,-4.05) 19(0.25,-4.05) 20(0.75,-4.05) 21(1.25,-4.05) 22(1.75,-4.05) 23(2.25,-4.05) 24(2.75,-4.05) 37(2.75,4.05) 38(2.25,4.05) 39(1.75,4.05) 40(1.25,4.05) 41(0.75,4.05) 42(0.25,4.05) 43(-0.25,4.05) 44(-0.75,4.05) 45(-1.25,4.05) 46(-1.75,4.05) 47(-2.25,4.05) 48(-2.75,4.05)
  silkscreen extent -4.18,-2.75 2.75,3.57
LQFP-176 [mm] "ADSP-BF518"
  rect 1.75x0.3 smd: 1(-12.575,10.75) 2(-12.575,10.25) 3(-12.575,9.75) 4(-12.575,9.25) 5(-12.575,8.75) 6(-12.575,8.25) 7(-12.575,7.75) 8(-12.575,7.25) 9(-12.575,6.75) 10(-12.575,6.25) 11(-12.575,5.75) 12(-12.575,5.25) 13(-12.575,4.75) 14(-12.575,4.25) 15(-12.575,3.75) 16(-12.575,3.25) 17(-12.575,2.75) 18(-12.575,2.25) 19(-12.575,1.75) 20(-12.575,1.25) 21(-12.575,0.75) 22(-12.575,0.25) 23(-12.575,-0.25) 24(-12.575,-0.75) 25(-12.575,-1.25) 26(-12.575,-1.75) 27(-12.575,-2.25) 28(-12.575,-2.75) 29(-12.575,-3.25) 30(-12.575,-3.75) 31(-12.575,-4.25) 32(-12.575,-4.75) 33(-12.575,-5.25) 34(-12.575,-5.75) 35(-12.575,-6.25) 36(-12.575,-6.75) 37(-12.575,-7.25) 38(-12.575,-7.75) 39(-12.575,-8.25) 40(-12.575,-8.75) 41(-12.575,-9.25) 42(-12.575,-9.75) 43(-12.575,-10.25) 44(-12.575,-10.75) 89(12.575,-10.75) 90(12.575,-10.25) 91(12.575,-9.75) 92(12.575,-9.25) 93(12.575,-8.75) 94(12.575,-8.25) 95(12.575,-7.75) 96(12.575,-7.25) 97(12.575,-6.75) 98(12.575,-6.25) 99(12.575,-5.75) 100(12.575,-5.25) 101(12.575,-4.75) 102(12.575,-4.25) 103(12.575,-3.75) 104(12.575,-3.25) 105(12.575,-2.75) 106(12.575,-2.25) 107(12.575,-1.75) 108(12.575,-1.25) 109(12.575,-0.75) 110(12.575,-0.25) 111(12.575,0.25) 112(12.575,0.75) 113(12.575,1.25) 114(12.575,1.75) 115(12.575,2.25) 116(12.575,2.75) 117(12.575,3.25) 118(12.575,3.75) 119(12.575,4.25) 120(12.575,4.75) 121(12.575,5.25) 122(12.575,5.75) 123(12.575,6.25) 124(12.575,6.75) 125(12.575,7.25) 126(12.575,7.75) 127(12.575,8.25) 128(12.575,8.75) 129(12.575,9.25) 130(12.575,9.75) 131(12.575,10.25) 132(12.575,10.75)
  rect 0.3x1.75 smd: 45(-10.75,-12.575) 46(-10.25,-12.575) 47(-9.75,-12.575) 48(-9.25,-12.575) 49(-8.75,-12.575) 50(-8.25,-12.575) 51(-7.75,-12.575) 52(-7.25,-12.575) 53(-6.75,-12.575) 54(-6.25,-12.575) 55(-5.75,-12.575) 56(-5.25,-12.575) 57(-4.75,-12.575) 58(-4.25,-12.575) 59(-3.75,-12.575) 60(-3.25,-12.575) 61(-2.75,-12.575) 62(-2.25,-12.575) 63(-1.75,-12.575) 64(-1.25,-12.575) 65(-0.75,-12.575) 66(-0.25,-12.575) 67(0.25,-12.575) 68(0.75,-12.575) 69(1.25,-12.575) 70(1.75,-12.575) 71(2.25,-12.575) 72(2.75,-12.575) 73(3.25,-12.575) 74(3.75,-12.575) 75(4.25,-12.575) 76(4.75,-12.575) 77(5.25,-12.575) 78(5.75,-12.575) 79(6.25,-12.575) 80(6.75,-12.575) 81(7.25,-12.575) 82(7.75,-12.575) 83(8.25,-12.575) 84(8.75,-12.575) 85(9.25,-12.575) 86(9.75,-12.575) 87(10.25,-12.575) 88(10.75,-12.575) 133(10.75,12.575) 134(10.25,12.575) 135(9.75,12.575) 136(9.25,12.575) 137(8.75,12.575) 138(8.25,12.575) 139(7.75,12.575) 140(7.25,12.575) 141(6.75,12.575) 142(6.25,12.575) 143(5.75,12.575) 144(5.25,12.575) 145(4.75,12.575) 146(4.25,12.575) 147(3.75,12.575) 148(3.25,12.575) 149(2.75,12.575) 150(2.25,12.575) 151(1.75,12.575) 152(1.25,12.575) 153(0.75,12.575) 154(0.25,12.575) 155(-0.25,12.575) 156(-0.75,12.575) 157(-1.25,12.575) 158(-1.75,12.575) 159(-2.25,12.575) 160(-2.75,12.575) 161(-3.25,12.575) 162(-3.75,12.575) 163(-4.25,12.575) 164(-4.75,12.575) 165(-5.25,12.575) 166(-5.75,12.575) 167(-6.25,12.575) 168(-6.75,12.575) 169(-7.25,12.575) 170(-7.75,12.575) 171(-8.25,12.575) 172(-8.75,12.575) 173(-9.25,12.575) 174(-9.75,12.575) 175(-10.25,12.575) 176(-10.75,12.575)
  rect 6.2x6.2 smd: 177(0,0)
  silkscreen extent -12.7,-11.3 11.3,11.58
MICRO_SD [mm]
  rect 0.8x1.2 smd: 1(-1.92,-6.45) 2(-0.82,-6.45) 3(0.28,-6.45) 4(1.38,-6.45) 5(2.48,-6.45) 6(3.58,-6.45) 7(4.68,-6.45) 8(5.78,-6.45) 9(6.78,-6.45)
  rect 1.7x1 smd: 10(7.43,1.5)
  rect 1.3x2.5 smd: ""(-7.63,6.45) ""(-7.63,-2.05) ""(7.63,6.45)
  rect 1.3x1.7 smd: ""(7.63,-0.1)
  silkscreen extent -7.5,-6.75 7.5,9.75
Microphone [mm]
  round 1.524 hole 0.9: 1(0.95,0.8) 2(-0.95,0.8)
  silkscreen extent -3,-3 3,3, body extent -3.01,-3.01 3.01,3.01, height 2.7
MSOP-10 [mm] "SSM2167"
  rect 1.85x0.35 smd: 1(0,0) 2(0,-0.5) 3(0,-1) 4(0,-1.5) 5(0,-2) 6(4,-2) 7(4,-1.5) 8(4,-1) 9(4,-0.5) 10(4,0)
  silkscreen extent -0.13,-2.55 2.68,0.85
OSC_16.384MHz [mm]
  rect 1.8x2 smd: 1(0,0) 2(-5.08,0) 3(-5.08,-4.2) 4(0,-4.2)
  silkscreen extent -6.28,-5.5 1.2,1.88
OSC_25MHz [mm]
  rect 1.8x2 smd: 1(0,0) 2(-5.08,0) 3(-5.08,-4.2) 4(0,-4.2)
  silkscreen extent -6.34,-4.7 1.26,1.52
Phone_Jack [mm] "Phone_Jack"
  rect 2.4x2.45 smd: 1(0,0) 2(8.3,8.55) 3(3,0) 5(6,0)
  rect 2.4x1.8 smd: 4(1.9,8.875)
  round 1.9 hole 1.9: ""(-0.7,4.375)
  round 1.4 hole 1.4: ""(4.7,4.375)
  silkscreen extent -2.9,0.58 9.24,7.98
Power_Jack [mm] "Power_Jack"
  rect 2x4.5 hole 1 slot 3.5 at 90 deg: 1(0,0)
  rect 4x2 hole 1 slot 3 at 0 deg: 2(-2.95,4.9)
  rect 2x4 hole 1 slot 3 at 90 deg: 3(-6,0)
  silkscreen extent -13.7,-4.9 0.8,4.9
"Push Button"#1 [mm] "Push Button"
  rect 1.55x1.3 smd: 1(0,0) 1(7.7,-0.025) 2(0,-4.5) 2(7.7,-4.5)
  silkscreen extent -1.09,-5.49 8.79,0.99
"Push Button"#2 [mm] "Push Button"
  rect 1.55x1.3 smd: 1(0,0) 1(7.95,0) 2(0,-4.5) 2(7.95,-4.5)
  silkscreen extent -1.09,-5.49 9.04,0.99
QFN-24 [mm] "ADP5588"
  rect 2.3x2.3 smd: 0(2.152,-1.25)
  rect 1x0.25 smd: 1(0,0) 2(0,-0.5) 3(0,-1) 4(0,-1.5) 5(0,-2) 6(0,-2.5) 13(4.304,-2.5) 14(4.304,-2) 15(4.304,-1.5) 16(4.304,-1) 17(4.304,-0.5) 18(4.304,0)
  rect 0.25x1 smd: 7(0.902,-3.402) 8(1.402,-3.402) 9(1.902,-3.402) 10(2.402,-3.402) 11(2.902,-3.402) 12(3.402,-3.402) 19(3.402,0.902) 20(2.902,0.902) 21(2.402,0.902) 22(1.902,0.902) 23(1.402,0.902) 24(0.902,0.902)
  silkscreen extent -1,-3.25 4.15,0.75
R_0402 [mm]
  rect 0.9x0.7 smd: 1(-0.65,0) 2(0.65,0)
  silkscreen extent -1.29,-0.54 1.29,0.54
R_0603 [mm]
  rect 1.1x1 smd: 1(-0.85,0) 2(0.85,0)
  silkscreen extent -1.59,-0.69 1.59,0.69
R_1206 [mm]
  rect 1.6x1.8 smd: 1(-1.4,0) 2(1.4,0)
  silkscreen extent -2.39,-1.09 2.39,1.09
R_2512 [mm]
  rect 1.8x3.2 smd: 1(-2.8,0) 2(2.8,0)
  silkscreen extent -1.6,-1.5 1.6,1.5
RJ-45 [mm]
  rect 1.8x1.8 hole 1.1: 1(0,0)
  round 1.8 hole 1.1: 2(-1.27,-2.54) 3(-2.54,0) 4(-3.81,-2.54) 5(-5.08,0) 6(-6.35,-2.54) 7(-7.62,0) 8(-8.89,-2.54) 9(1.02,4.83) 10(-1.52,4.83) 11(-7.37,4.83) 12(-9.91,4.83)
  round 2.4 hole 1.71: 13(3.43,-5.84) 14(-12.32,-5.84)
  round 3.3 hole 3.3: ""(-10.16,-8.89) ""(1.27,-8.89)
  silkscreen extent -12.83,-19.87 3.94,6.04
SO-8 [mm] "S25FL032P0XMFI010"
  rect 1.5x0.6 smd: 1(0,0) 2(0,-1.27) 3(0,-2.54) 4(0,-3.81) 5(7.35,-3.81) 6(7.35,-2.54) 7(7.35,-1.27) 8(7.35,0)
  silkscreen extent -0.13,-4.55 6.2,0.97
SOCKET_1x7 [mm] "Keypad_Connector"
  rect 1.02x1.905 smd: 1(-7.62,-1.777) 2(-5.08,1.777) 3(-2.54,-1.777) 4(0,1.777) 5(2.54,-1.777) 6(5.08,1.777) 7(7.62,-1.777)
  silkscreen extent -9.57,-3.05 8.89,3.05
SOCKET_1x16 [mm] "LCD_Connector"
  rect 1.02x1.905 smd: 1(0,0) 2(2.54,3.555) 3(5.08,0) 4(7.62,3.555) 5(10.16,0) 6(12.7,3.555) 7(15.24,0) 8(17.78,3.555) 9(20.32,0) 10(22.86,3.555) 11(25.4,0) 12(27.94,3.555) 13(30.48,0) 14(33.02,3.555) 15(35.56,0) 16(38.1,3.555)
  silkscreen extent -1.95,-1.27 39.37,4.82
"SOIC-8 (AT93C56A)" [mm] "AT93C56A"
  rect 2.2x0.6 smd: 1(-2.4,1.905) 2(-2.4,0.635) 3(-2.4,-0.635) 4(-2.4,-1.905) 5(2.4,-1.905) 6(2.4,-0.635) 7(2.4,0.635) 8(2.4,1.905)
  silkscreen extent -2.52,-2.5 0.9,2.88
"SOIC-8 (SSM2211)" [mm] "SSM2211"
  rect 2.2x0.6 smd: 1(0,0) 2(0,-1.27) 3(0,-2.54) 4(0,-3.81) 5(4.8,-3.81) 6(4.8,-2.54) 7(4.8,-1.27) 8(4.8,0)
  silkscreen extent -0.13,-4.41 3.3,0.97
"SOIC-8 (TPS5420MDREP)" [mil] "TPS5420MDREP"
  rect 80x26 smd: 1(0,0) 2(0,-50) 3(0,-100) 4(0,-150) 5(220,-150) 6(220,-100) 7(220,-50) 8(220,0)
  silkscreen extent -5,-173 161,38
SOIC-16 [mm]
  rect 2.2x0.6 smd: 1(-2.4,4.445) 2(-2.4,3.175) 3(-2.4,1.905) 4(-2.4,0.635) 5(-2.4,-0.635) 6(-2.4,-1.905) 7(-2.4,-3.175) 8(-2.4,-4.445) 9(2.4,-4.445) 10(2.4,-3.175) 11(2.4,-1.905) 12(2.4,-0.635) 13(2.4,0.635) 14(2.4,1.905) 15(2.4,3.175) 16(2.4,4.445)
  silkscreen extent -2.52,-5 0.9,5.42
SOT-23 [mm] "AME8800AEETZ"
  rect 1.4x0.6 smd: 1(0,0) 2(0,-1.9) 3(2.4,-0.95)
  silkscreen extent -0.12,-2.5 2.1,0.97
SOT-143 [mm] "CAT811S"
  rect 1.35x1 smd: 1(0,0)
  rect 1.35x0.6 smd: 2(0,-1.72) 3(2.05,-1.72) 4(2.05,0.2)
  silkscreen extent -0.13,-2.26 1.73,1.17
SOT-223 [mm] "TPS73701DCQ"
  rect 2.2x0.65 smd: 1(0,0) 2(0,-1.27) 3(0,-2.54) 4(0,-3.81) 5(0,-5.08)
  rect 2.2x3.3 smd: 6(6,-2.54)
  silkscreen extent -0.12,-5.81 4.5,1
Speaker [mm] "Speaker"
  rect 2.5x2.5 hole 1.5: 1(0,0)
  round 2.5 hole 1.5: 2(0,-4)
  silkscreen extent -2,-10 37,6, body extent 1.9,-10.1 37,6.1, height 7.4
"Test Point" [mm]
  round 0.9 smd: 1(0,0)
  silkscreen extent -0.53,-0.53 0.53,0.53
TPA511GLFS [mm]
  rect 1x1.4 smd: 1(-4.45,-3) 2(-4.45,-1.3) 3(4.45,-1.3) 4(4.45,-3) 5(4.45,3) 6(-4.45,1.3) 7(-4.45,3)
  silkscreen extent -3.53,-4 3.53,4
TSOP-54 [mm] "MT48LC16M16A2"
  rect 1.7x0.5 smd: 1(-5.525,10.4) 2(-5.525,9.6) 3(-5.525,8.8) 4(-5.525,8) 5(-5.525,7.2) 6(-5.525,6.4) 7(-5.525,5.6) 8(-5.525,4.8) 9(-5.525,4) 10(-5.525,3.2) 11(-5.525,2.4) 12(-5.525,1.6) 13(-5.525,0.8) 14(-5.525,0) 15(-5.525,-0.8) 16(-5.525,-1.6) 17(-5.525,-2.4) 18(-5.525,-3.2) 19(-5.525,-4) 20(-5.525,-4.8) 21(-5.525,-5.6) 22(-5.525,-6.4) 23(-5.525,-7.2) 24(-5.525,-8) 25(-5.525,-8.8) 26(-5.525,-9.6) 27(-5.525,-10.4) 28(5.525,-10.4) 29(5.525,-9.6) 30(5.525,-8.8) 31(5.525,-8) 32(5.525,-7.2) 33(5.525,-6.4) 34(5.525,-5.6) 35(5.525,-4.8) 36(5.525,-4) 37(5.525,-3.2) 38(5.525,-2.4) 39(5.525,-1.6) 40(5.525,-0.8) 41(5.525,0) 42(5.525,0.8) 43(5.525,1.6) 44(5.525,2.4) 45(5.525,3.2) 46(5.525,4) 47(5.525,4.8) 48(5.525,5.6) 49(5.525,6.4) 50(5.525,7.2) 51(5.525,8) 52(5.525,8.8) 53(5.525,9.6) 54(5.525,10.4)
  silkscreen extent -5.65,-11.15 4.28,11.32
TSSOP-20 [mm] "AD73311LARUZ"
  rect 1.55x0.35 smd: 1(0,0) 2(0,-0.65) 3(0,-1.3) 4(0,-1.95) 5(0,-2.6) 6(0,-3.25) 7(0,-3.9) 8(0,-4.55) 9(0,-5.2) 10(0,-5.85) 11(5.7,-5.85) 12(5.7,-5.2) 13(5.7,-4.55) 14(5.7,-3.9) 15(5.7,-3.25) 16(5.7,-2.6) 17(5.7,-1.95) 18(5.7,-1.3) 19(5.7,-0.65) 20(5.7,0)
  silkscreen extent -0.12,-6.22 4.52,0.85
"USB Connector" [mm]
  round 1.6 hole 1: 1(0,0) 2(-2.5,0) 3(-2.5,-2) 4(0,-2)
  round 3.5 hole 2.3: 5(-7.27,-4.71) 5(4.77,-4.71)
  silkscreen extent -9.22,-15.01 6.72,0.99
XTAL_6MHz [mm] "XTAL"
  rect 5.5x1.5 smd: 1(-4.25,0) 2(4.25,0)
  silkscreen extent -7.25,-2.41 7.25,2.41
XTAL_32.768kHz [mm] "XTAL"
  rect 4.1x4.1 smd: 1(-4,0) 2(4,0)
  silkscreen extent -6.4,-2.4 6.4,2.4

## Part data
C100 C101 C102 C103 C104 C105 C106 C107 C108 C109 C110 C111 C200 C201 C202 C203 C204 C205 C206 C207 C208 C209 C210 C211 C212 C213 C214 C215 C216 C217 C218 C300 C301 C302 C303 C304 C306 C307 C308 C309 C310 C311 C312 C313 C400 C401 C402 C403 C404 C405 C406 C407 C408 C409 C410 C411 C412 C413 C414 C415 C416 C417 C418 C419 C420 C421 C422 C423 C600 C601 C602 C603 C604 C605 C606 C607 C608 C609 C610 C611 C612 C613 C614 C615 C616 C617 C618 C619 C620 C621 C622 C623 C624 C625 C626 C627 C628 C629 C630 C631 C632 C633 C634 C635 C636 C637 C638 C639 C640 C641 C642 C643 C644 C646 C647 C648 C649 C651 C652 C653 C654: library part Capacitor
C305 C645 C650: library part Capacitor_Pol
CON202: library part "RS-232 Connector"
D100 D200 D500 D501 D502 D603: "Red LED"
D300: "Green LED"
D600 D601 D602: library part Schottky_Diode
L200 L201 L300 L301 L302 L400 L401 L402 L600 L601: library part Inductor
M400: library part Microphone
R100 R101 R102 R103 R104 R105 R106 R107 R108 R109 R110 R111 R112 R113 R114 R115 R116 R117 R118 R119 R121 R122 R123 R124 R125 R127 R129 R131 R133 R134 R135 R136 R137 R138 R139 R140 R141 R142 R143 R144 R145 R146 R147 R148 R149 R150 R151 R200 R201 R202 R203 R206 R207 R208 R209 R210 R211 R212 R213 R214 R215 R216 R217 R219 R220 R221 R222 R223 R224 R225 R226 R227 R228 R229 R230 R231 R232 R233 R234 R235 R236 R237 R238 R239 R240 R241 R242 R243 R244 R245 R247 R300 R301 R302 R303 R304 R305 R306 R307 R308 R309 R310 R311 R312 R313 R314 R315 R316 R317 R318 R319 R320 R321 R322 R323 R324 R325 R326 R327 R328 R400 R401 R402 R403 R404 R405 R406 R407 R408 R409 R410 R411 R412 R413 R414 R415 R416 R417 R418 R500 R501 R502 R503 R504 R505 R506 R507 R508 R509 R510 R511 R512 R513 R514 R515 R516 R600 R601 R602 R603 R604 R605 R606 R607 R608 R609 R610 R611: library part Resistor
S400: library part Speaker
U204: library part "RS-232 Transceiver"
X100 X200: library part XTAL
Y100 Y300: library part Oscillator_25MHz
Y400: library part Oscillator_16.384MHz

## Via types
v1: diameter 23.62, hole 11.81, Top Layer to Bottom Layer, tented both sides, 566 vias
v2: diameter 55.12, hole 31.5, Top Layer to Bottom Layer, 36 vias
v3: diameter 25.98, hole 12.99, Top Layer to Bottom Layer, tented top, 29 vias
v4: diameter 157.48, hole 98.43, Top Layer to Bottom Layer, 8 vias
v5: diameter 55.12, hole 31.5, Top Layer to Bottom Layer, tented both sides, 4 vias
v6: diameter 137.8, hole 90.55, Top Layer to Bottom Layer, 4 vias

## Nets (pads, with @x,y where several pads share a name; then routed paths per layer and width w, separated by ;. In a path a pad name is that pad's centre, name@x,y a point inside that pad or via, vN(x,y) a via of type N, cw(c..) or ccw(c..) an arc to the next point about the centre after c; other vN are vias at no path point)
A1: R100.1 U101.23 | length 1879.9
  Top Layer w10: v1(1238.11,3399.33) R100.1@1238.11,3448.39 ; U101.23@1428.26,2513.62 v1(1474.44,2513.62)
  Bottom Layer w10: v1(1238.11,3399.33) 1277.44,3360 1415,3360 1455,3360 1475,3360 cw(c1485,3360) 1495,3360 ccw(c1505,3360) 1515,3360 cw(c1525,3360) 1535,3360 1555,3360 1586.02,3328.98 1586.02,3299.45 ccw(c1586.02,3289.45) 1586.02,3279.45 cw(c1586.02,3269.45) 1586.02,3259.45 ccw(c1586.02,3249.45) 1586.02,3239.45 cw(c1586.02,3229.45) 1586.02,3219.45 ccw(c1586.02,3209.45) 1586.02,3199.45 cw(c1586.02,3189.45) 1586.02,3179.45 ccw(c1586.02,3169.45) 1586.02,3159.45 cw(c1586.02,3149.45) 1586.02,3139.45 ccw(c1586.02,3129.45) 1586.02,3119.45 cw(c1586.02,3109.45) 1586.02,3099.45 ccw(c1586.02,3089.45) 1586.02,3079.45 cw(c1586.02,3069.45) 1586.02,3059.45 ccw(c1586.02,3049.45) 1586.02,3039.45 cw(c1586.02,3029.45) 1586.02,3019.45 ccw(c1586.02,3009.45) 1586.02,2999.45 cw(c1586.02,2989.45) 1586.02,2979.45 ccw(c1586.02,2969.45) 1586.02,2959.45 cw(c1586.02,2949.45) 1586.02,2939.45 ccw(c1586.02,2929.45) 1586.02,2919.45 cw(c1586.02,2909.45) 1586.02,2899.45 ccw(c1586.02,2889.45) 1586.02,2879.45 cw(c1586.02,2869.45) 1586.02,2859.45 ccw(c1586.02,2849.45) 1586.02,2839.45 cw(c1586.02,2829.45) 1586.02,2819.45 ccw(c1586.02,2809.45) 1586.02,2799.45 cw(c1586.02,2789.45) 1586.02,2779.45 ccw(c1586.02,2769.45) 1586.02,2759.45 cw(c1586.02,2749.45) 1586.02,2739.45 ccw(c1586.02,2729.45) 1586.02,2719.45 cw(c1586.02,2709.45) 1586.02,2699.45 ccw(c1586.02,2689.45) 1586.02,2679.45 cw(c1586.02,2669.45) 1586.02,2659.45 ccw(c1586.02,2649.45) 1586.02,2639.45 cw(c1586.02,2629.45) 1586.02,2619.45 ccw(c1586.02,2609.45) 1586.02,2599.45 cw(c1586.02,2589.45) 1586.02,2579.45 ccw(c1586.02,2569.45) 1586.02,2559.45 1586.02,2531.02 1568.62,2513.62 1554.44,2513.62 cw(c1544.44,2513.62) 1534.44,2513.62 ccw(c1524.44,2513.62) 1514.44,2513.62 cw(c1504.44,2513.62) 1494.44,2513.62 v1(1474.44,2513.62)
A2: R102.1 U101.24 | length 1877.6
  Top Layer w10: v1(1188.11,3399.33) R102.1@1188.11,3448.39 ; U101.24@1428.26,2545.12 v1(1474.44,2545.12)
  Bottom Layer w10: v1(1188.11,3399.33) 1202.25,3385.19 ccw(c1209.32,3378.12) 1216.39,3371.05 cw(c1223.47,3363.98) 1230.54,3356.9 ccw(c1237.61,3349.83) 1244.68,3342.76 1262.44,3325 1282.44,3325 ccw(c1292.44,3325) 1302.44,3325 cw(c1312.44,3325) 1322.44,3325 ccw(c1332.44,3325) 1342.44,3325 cw(c1352.44,3325) 1362.44,3325 ccw(c1372.44,3325) 1382.44,3325 cw(c1392.44,3325) 1402.44,3325 ccw(c1412.44,3325) 1422.44,3325 cw(c1432.44,3325) 1442.44,3325 ccw(c1452.44,3325) 1462.44,3325 cw(c1472.44,3325) 1482.44,3325 1530,3325 1551.02,3303.98 1551.02,3239.09 cw(c1551.02,3229.09) 1551.02,3219.09 ccw(c1551.02,3209.09) 1551.02,3199.09 cw(c1551.02,3189.09) 1551.02,3179.09 ccw(c1551.02,3169.09) 1551.02,3159.09 cw(c1551.02,3149.09) 1551.02,3139.09 ccw(c1551.02,3129.09) 1551.02,3119.09 cw(c1551.02,3109.09) 1551.02,3099.09 ccw(c1551.02,3089.09) 1551.02,3079.09 cw(c1551.02,3069.09) 1551.02,3059.09 ccw(c1551.02,3049.09) 1551.02,3039.09 cw(c1551.02,3029.09) 1551.02,3019.09 ccw(c1551.02,3009.09) 1551.02,2999.09 cw(c1551.02,2989.09) 1551.02,2979.09 ccw(c1551.02,2969.09) 1551.02,2959.09 cw(c1551.02,2949.09) 1551.02,2939.09 ccw(c1551.02,2929.09) 1551.02,2919.09 cw(c1551.02,2909.09) 1551.02,2899.09 ccw(c1551.02,2889.09) 1551.02,2879.09 cw(c1551.02,2869.09) 1551.02,2859.09 ccw(c1551.02,2849.09) 1551.02,2839.09 cw(c1551.02,2829.09) 1551.02,2819.09 ccw(c1551.02,2809.09) 1551.02,2799.09 cw(c1551.02,2789.09) 1551.02,2779.09 ccw(c1551.02,2769.09) 1551.02,2759.09 cw(c1551.02,2749.09) 1551.02,2739.09 ccw(c1551.02,2729.09) 1551.02,2719.09 cw(c1551.02,2709.09) 1551.02,2699.09 ccw(c1551.02,2689.09) 1551.02,2679.09 cw(c1551.02,2669.09) 1551.02,2659.09 ccw(c1551.02,2649.09) 1551.02,2639.09 cw(c1551.02,2629.09) 1551.02,2619.09 ccw(c1551.02,2609.09) 1551.02,2599.09 cw(c1551.02,2589.09) 1551.02,2579.09 1551.02,2551.02 1545.12,2545.12 1534.44,2545.12 ccw(c1524.44,2545.12) 1514.44,2545.12 cw(c1504.44,2545.12) 1494.44,2545.12 v1(1474.44,2545.12)